# Altium PCB Aeroval-v2-PCB1.PcbDoc (part 1 of 2)
Units mm, origin at the board's own origin, x right, y up, seen from the top; angles counter-clockwise.
Board outline 100 x 100 mm, 6 copper layers (Top Layer, Internal Plane (GND), Signal Layer (VERT), Signal Layer 2 (HOR), Internal Plane (PWR), Bottom Layer), stack 1.231 mm thick; 208 components, 166 nets, 796 pads, 481 vias.
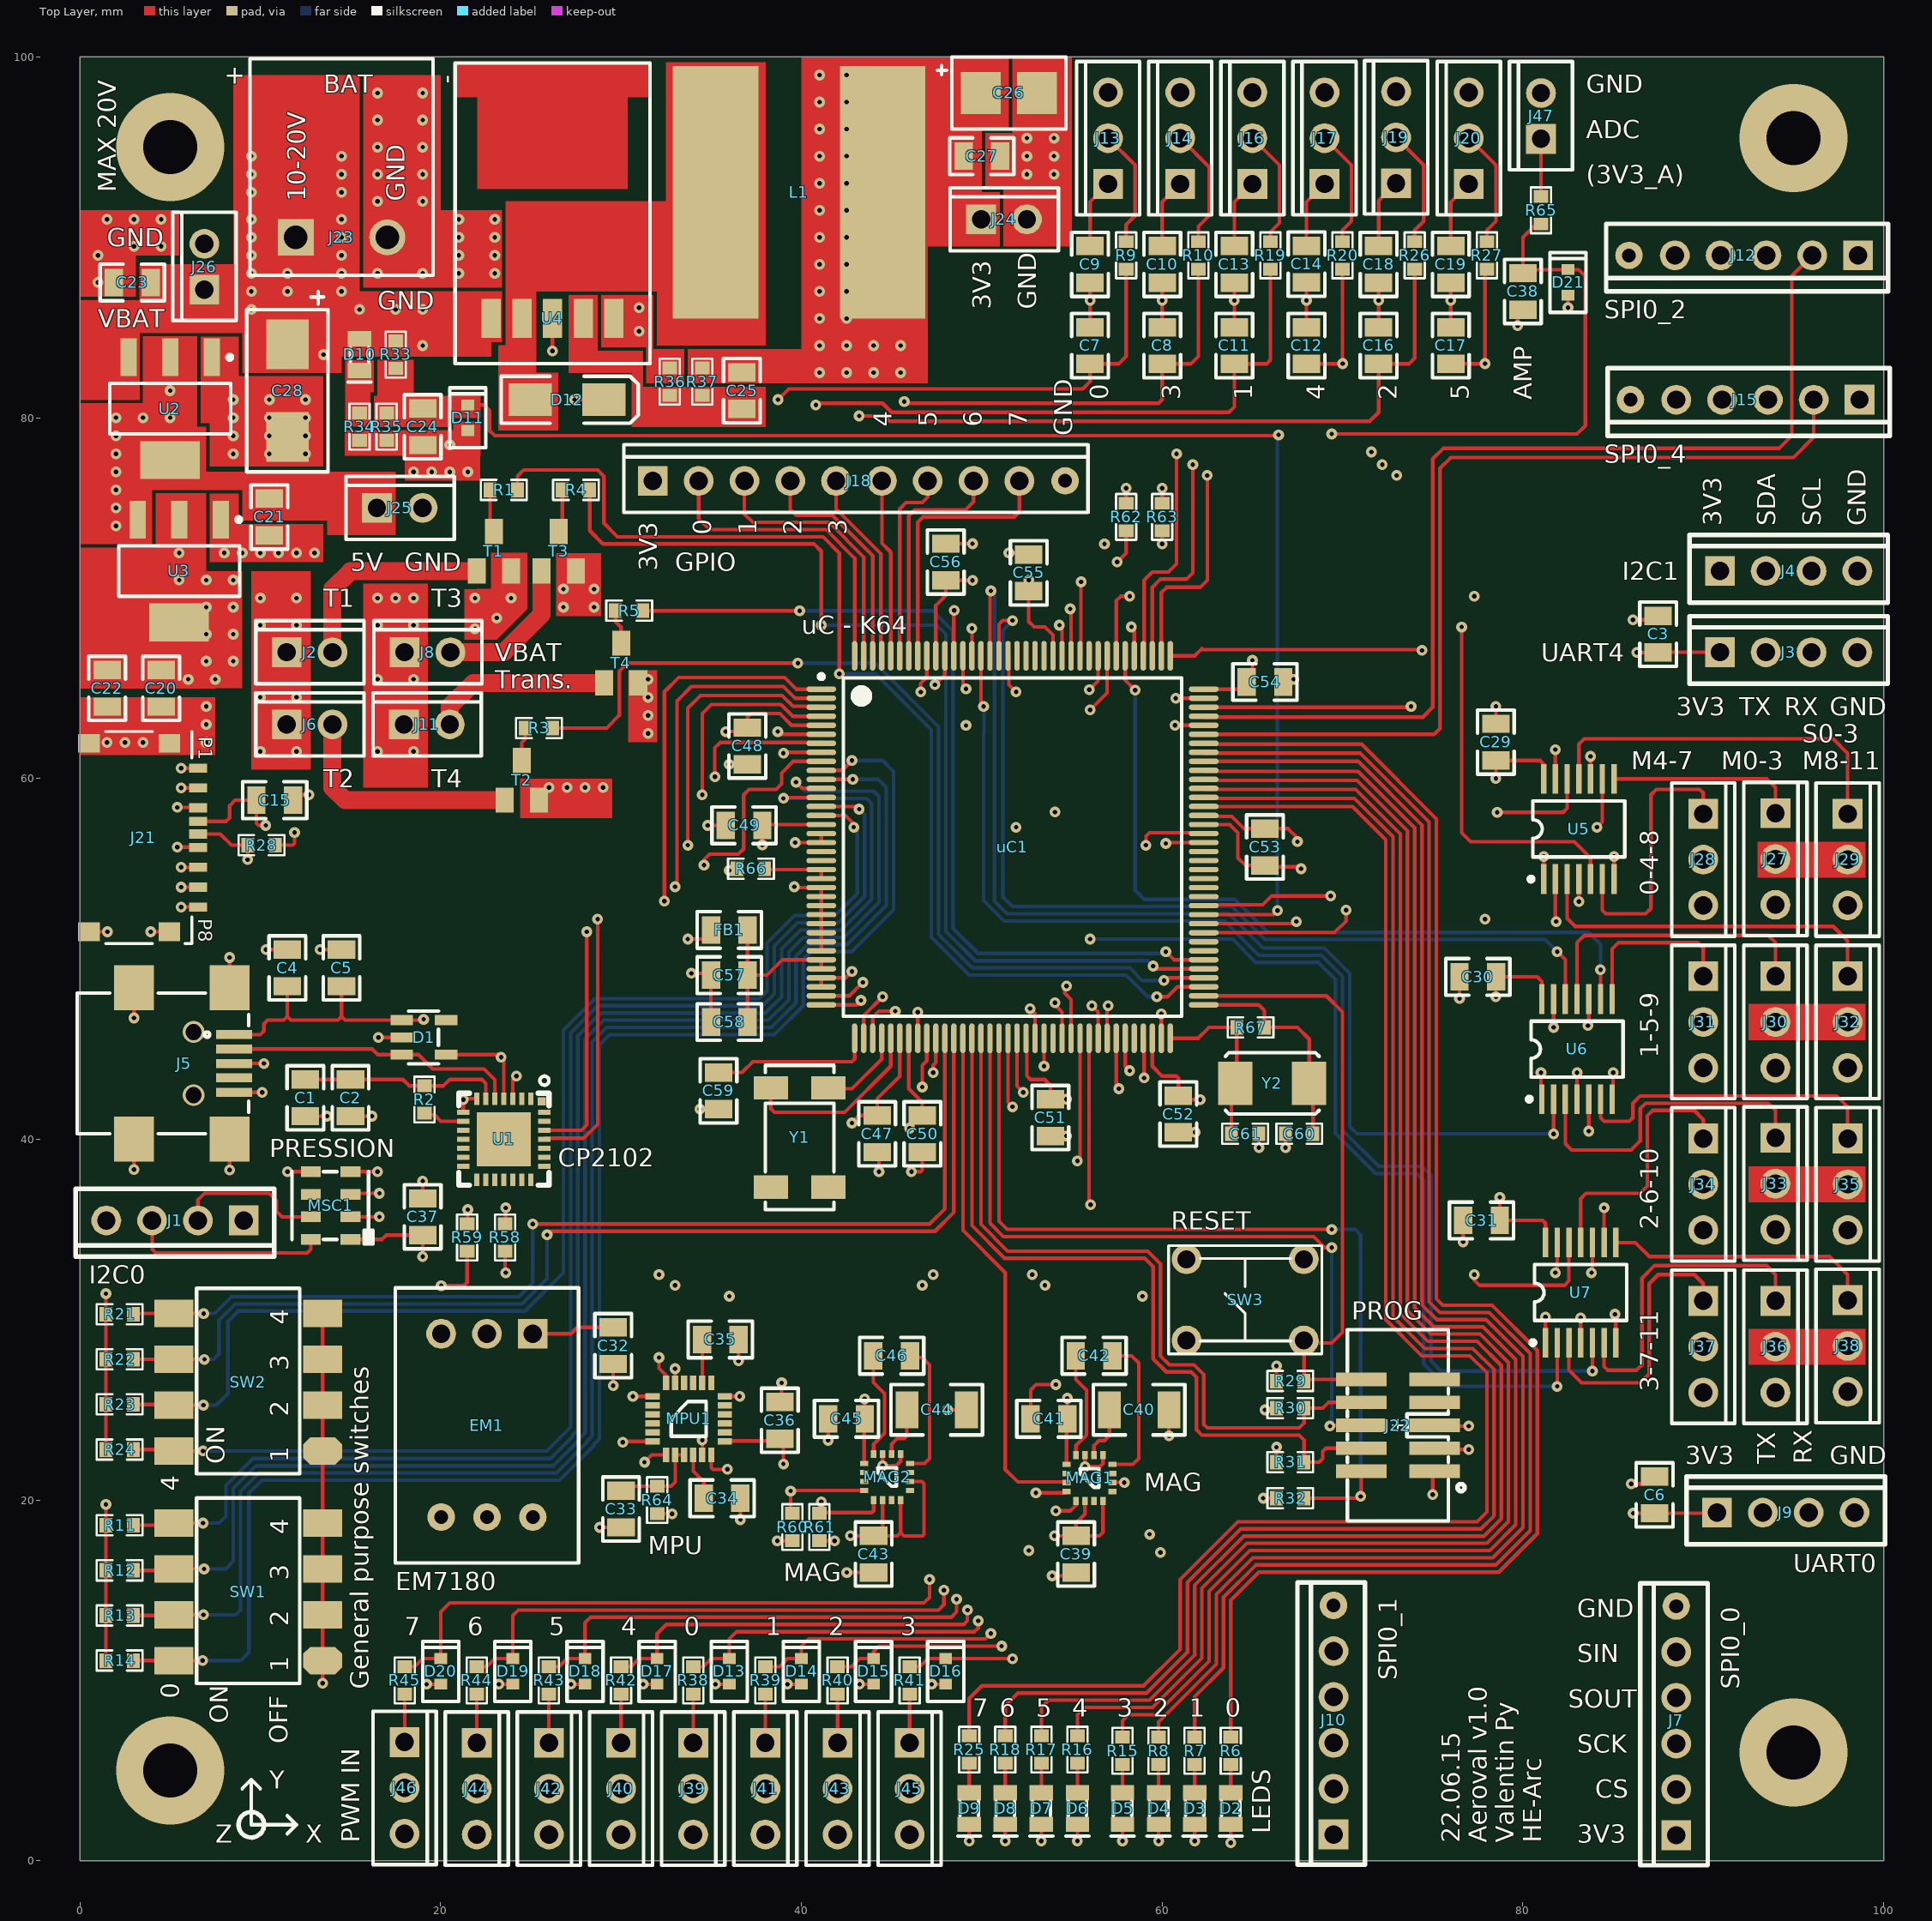
[diagram p0: Top Layer view]
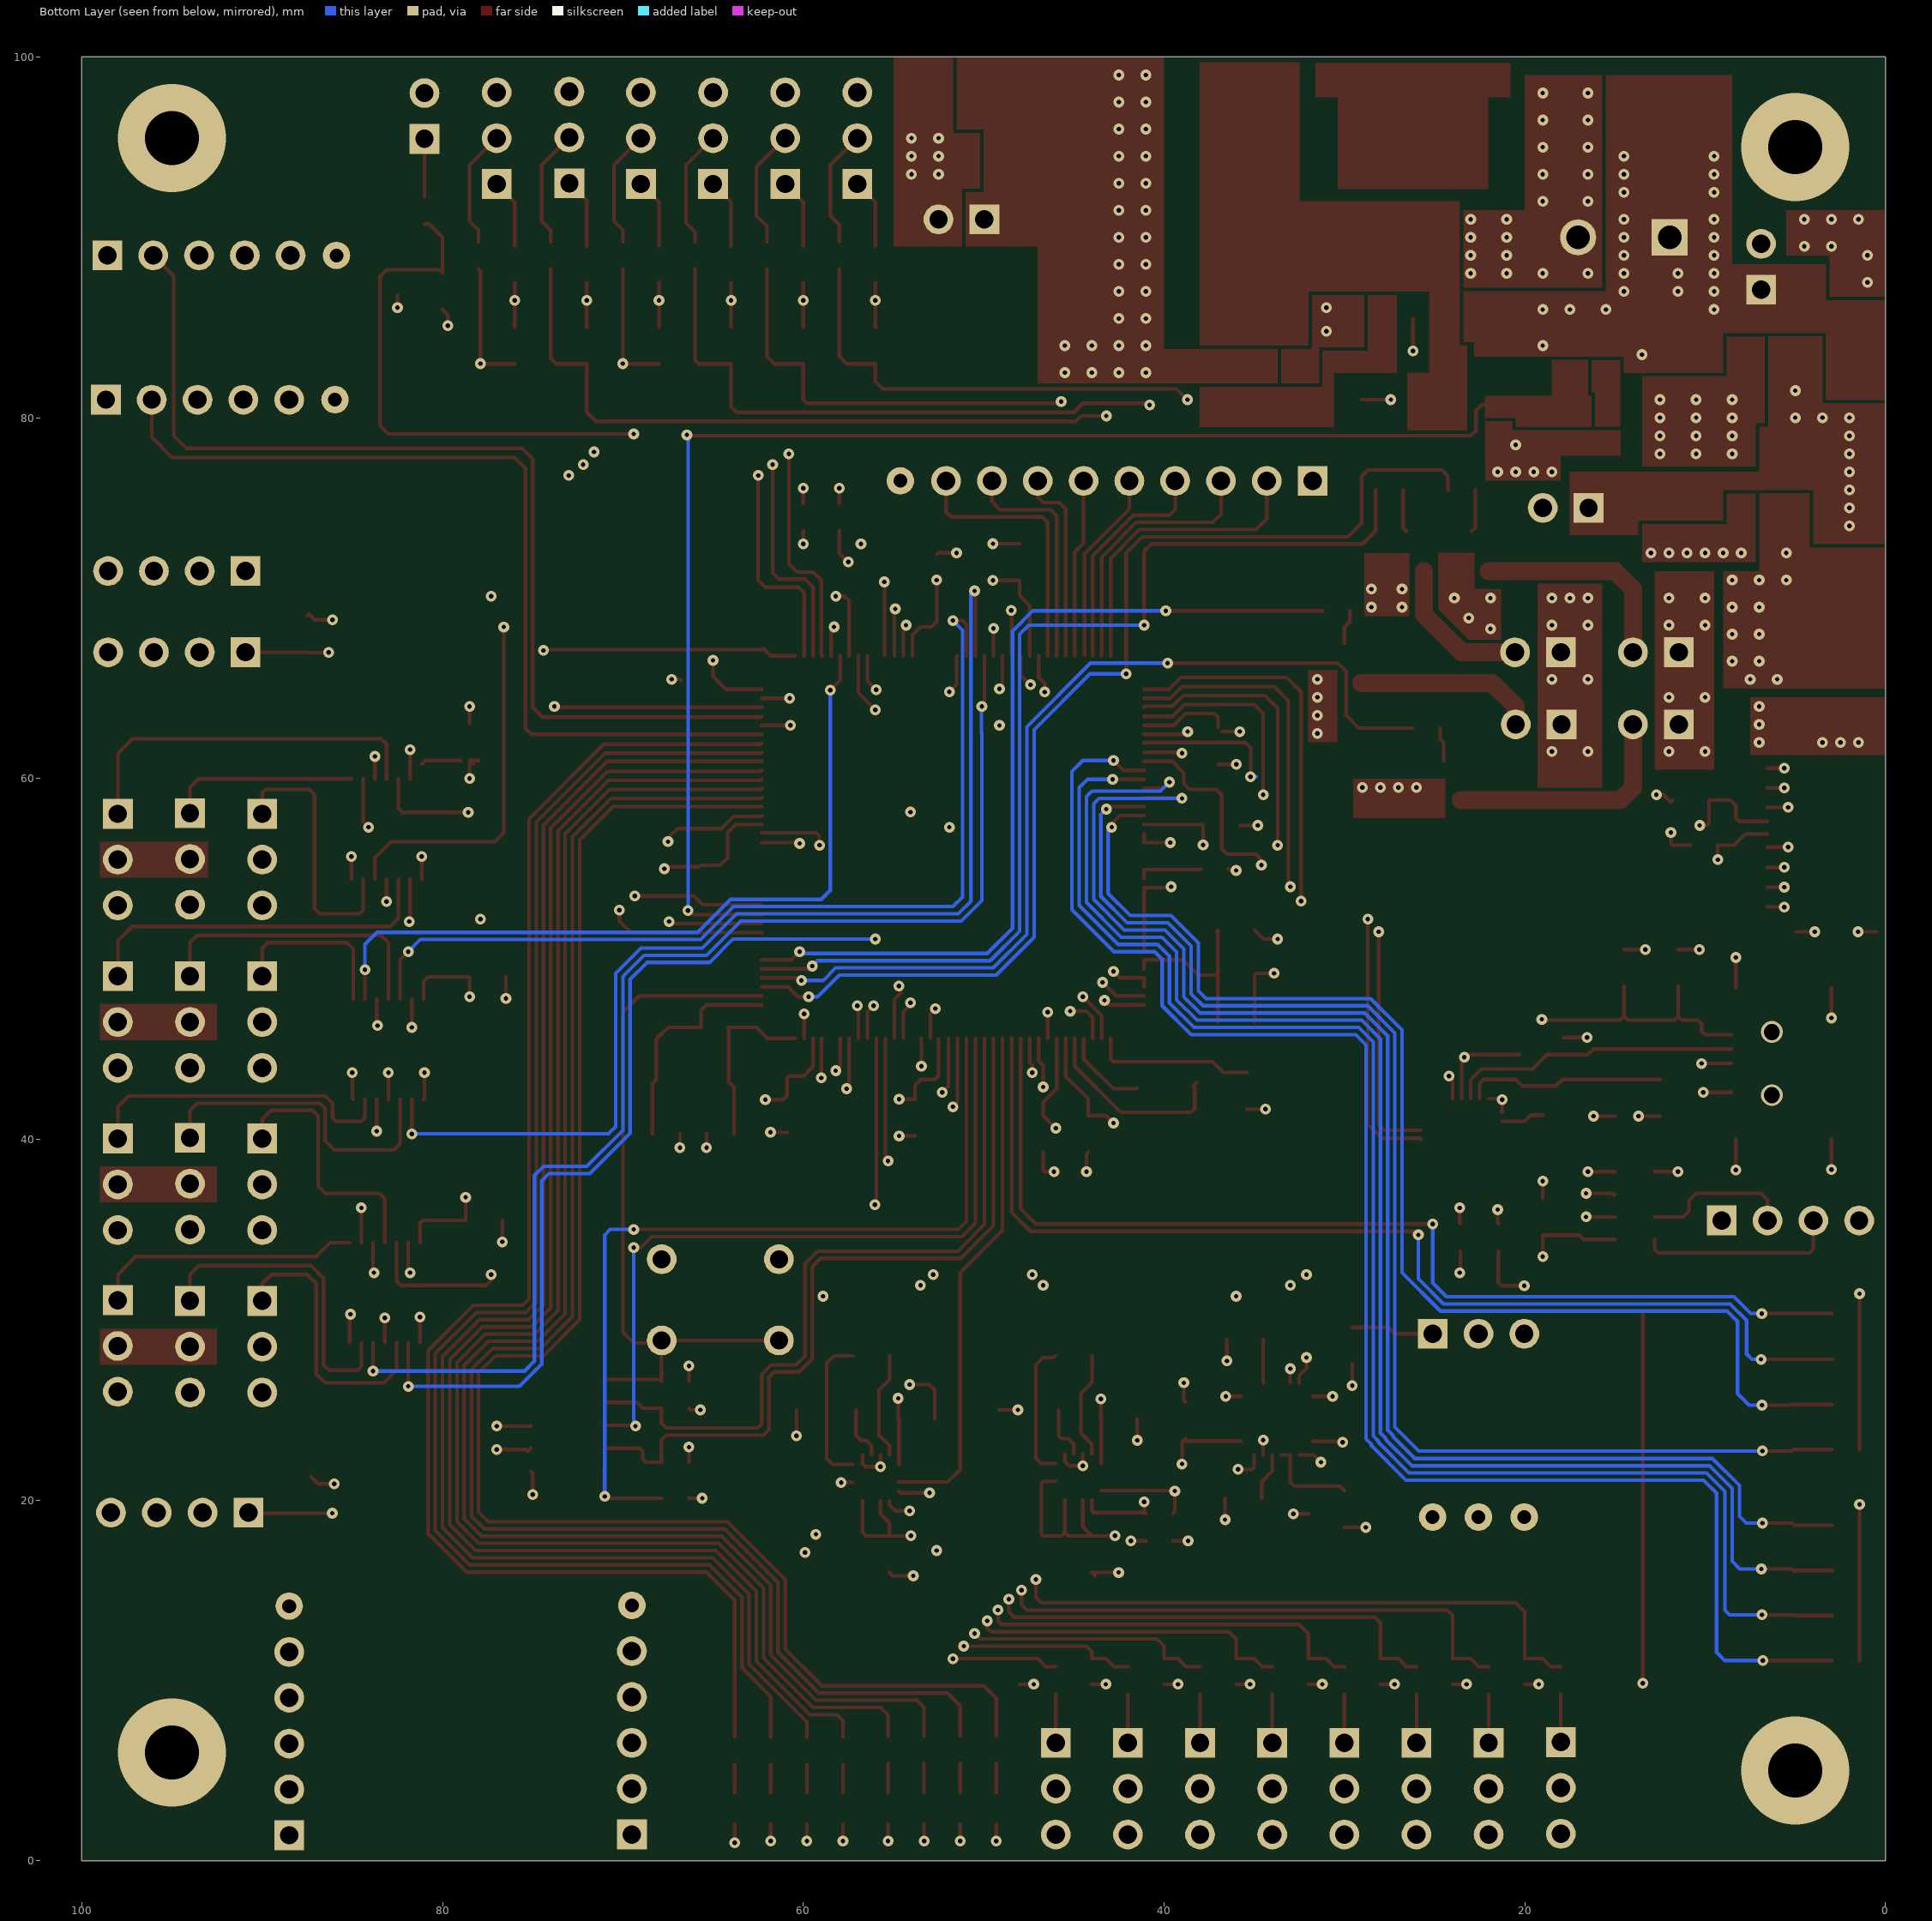
[diagram p1: Bottom Layer view, seen from below]
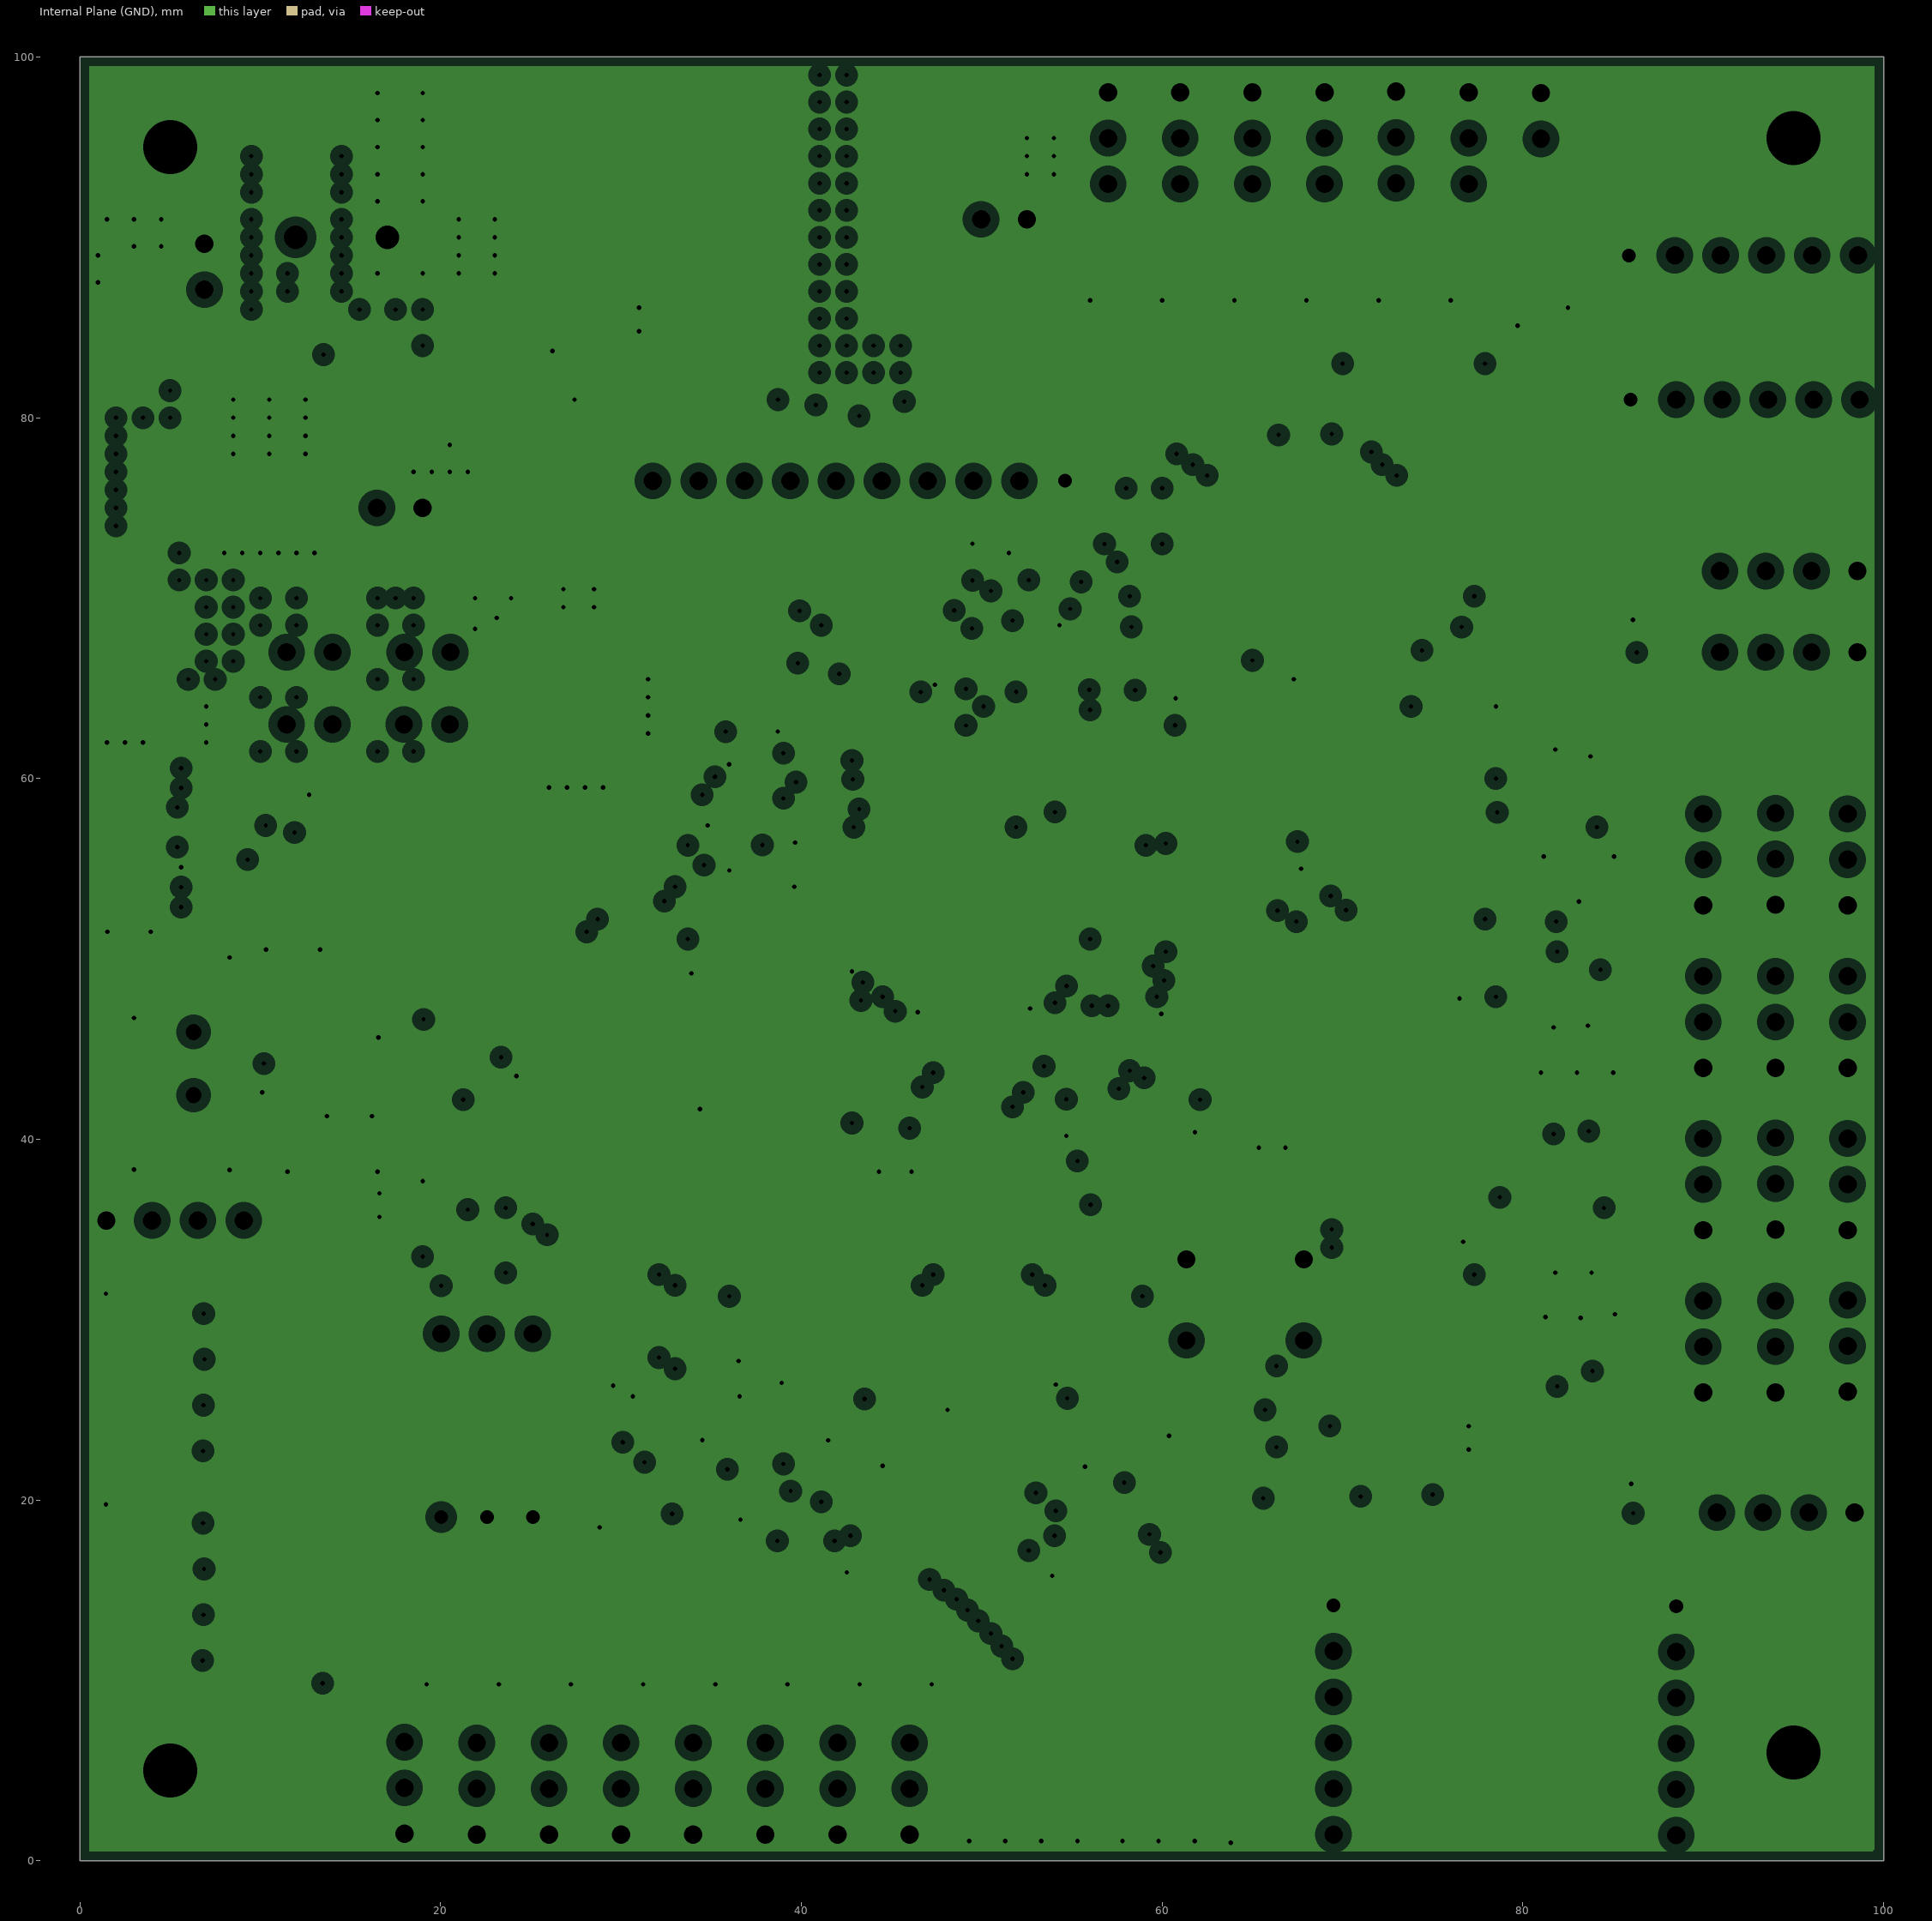
[diagram p2: Internal Plane (GND), clearances drawn from the general rule]
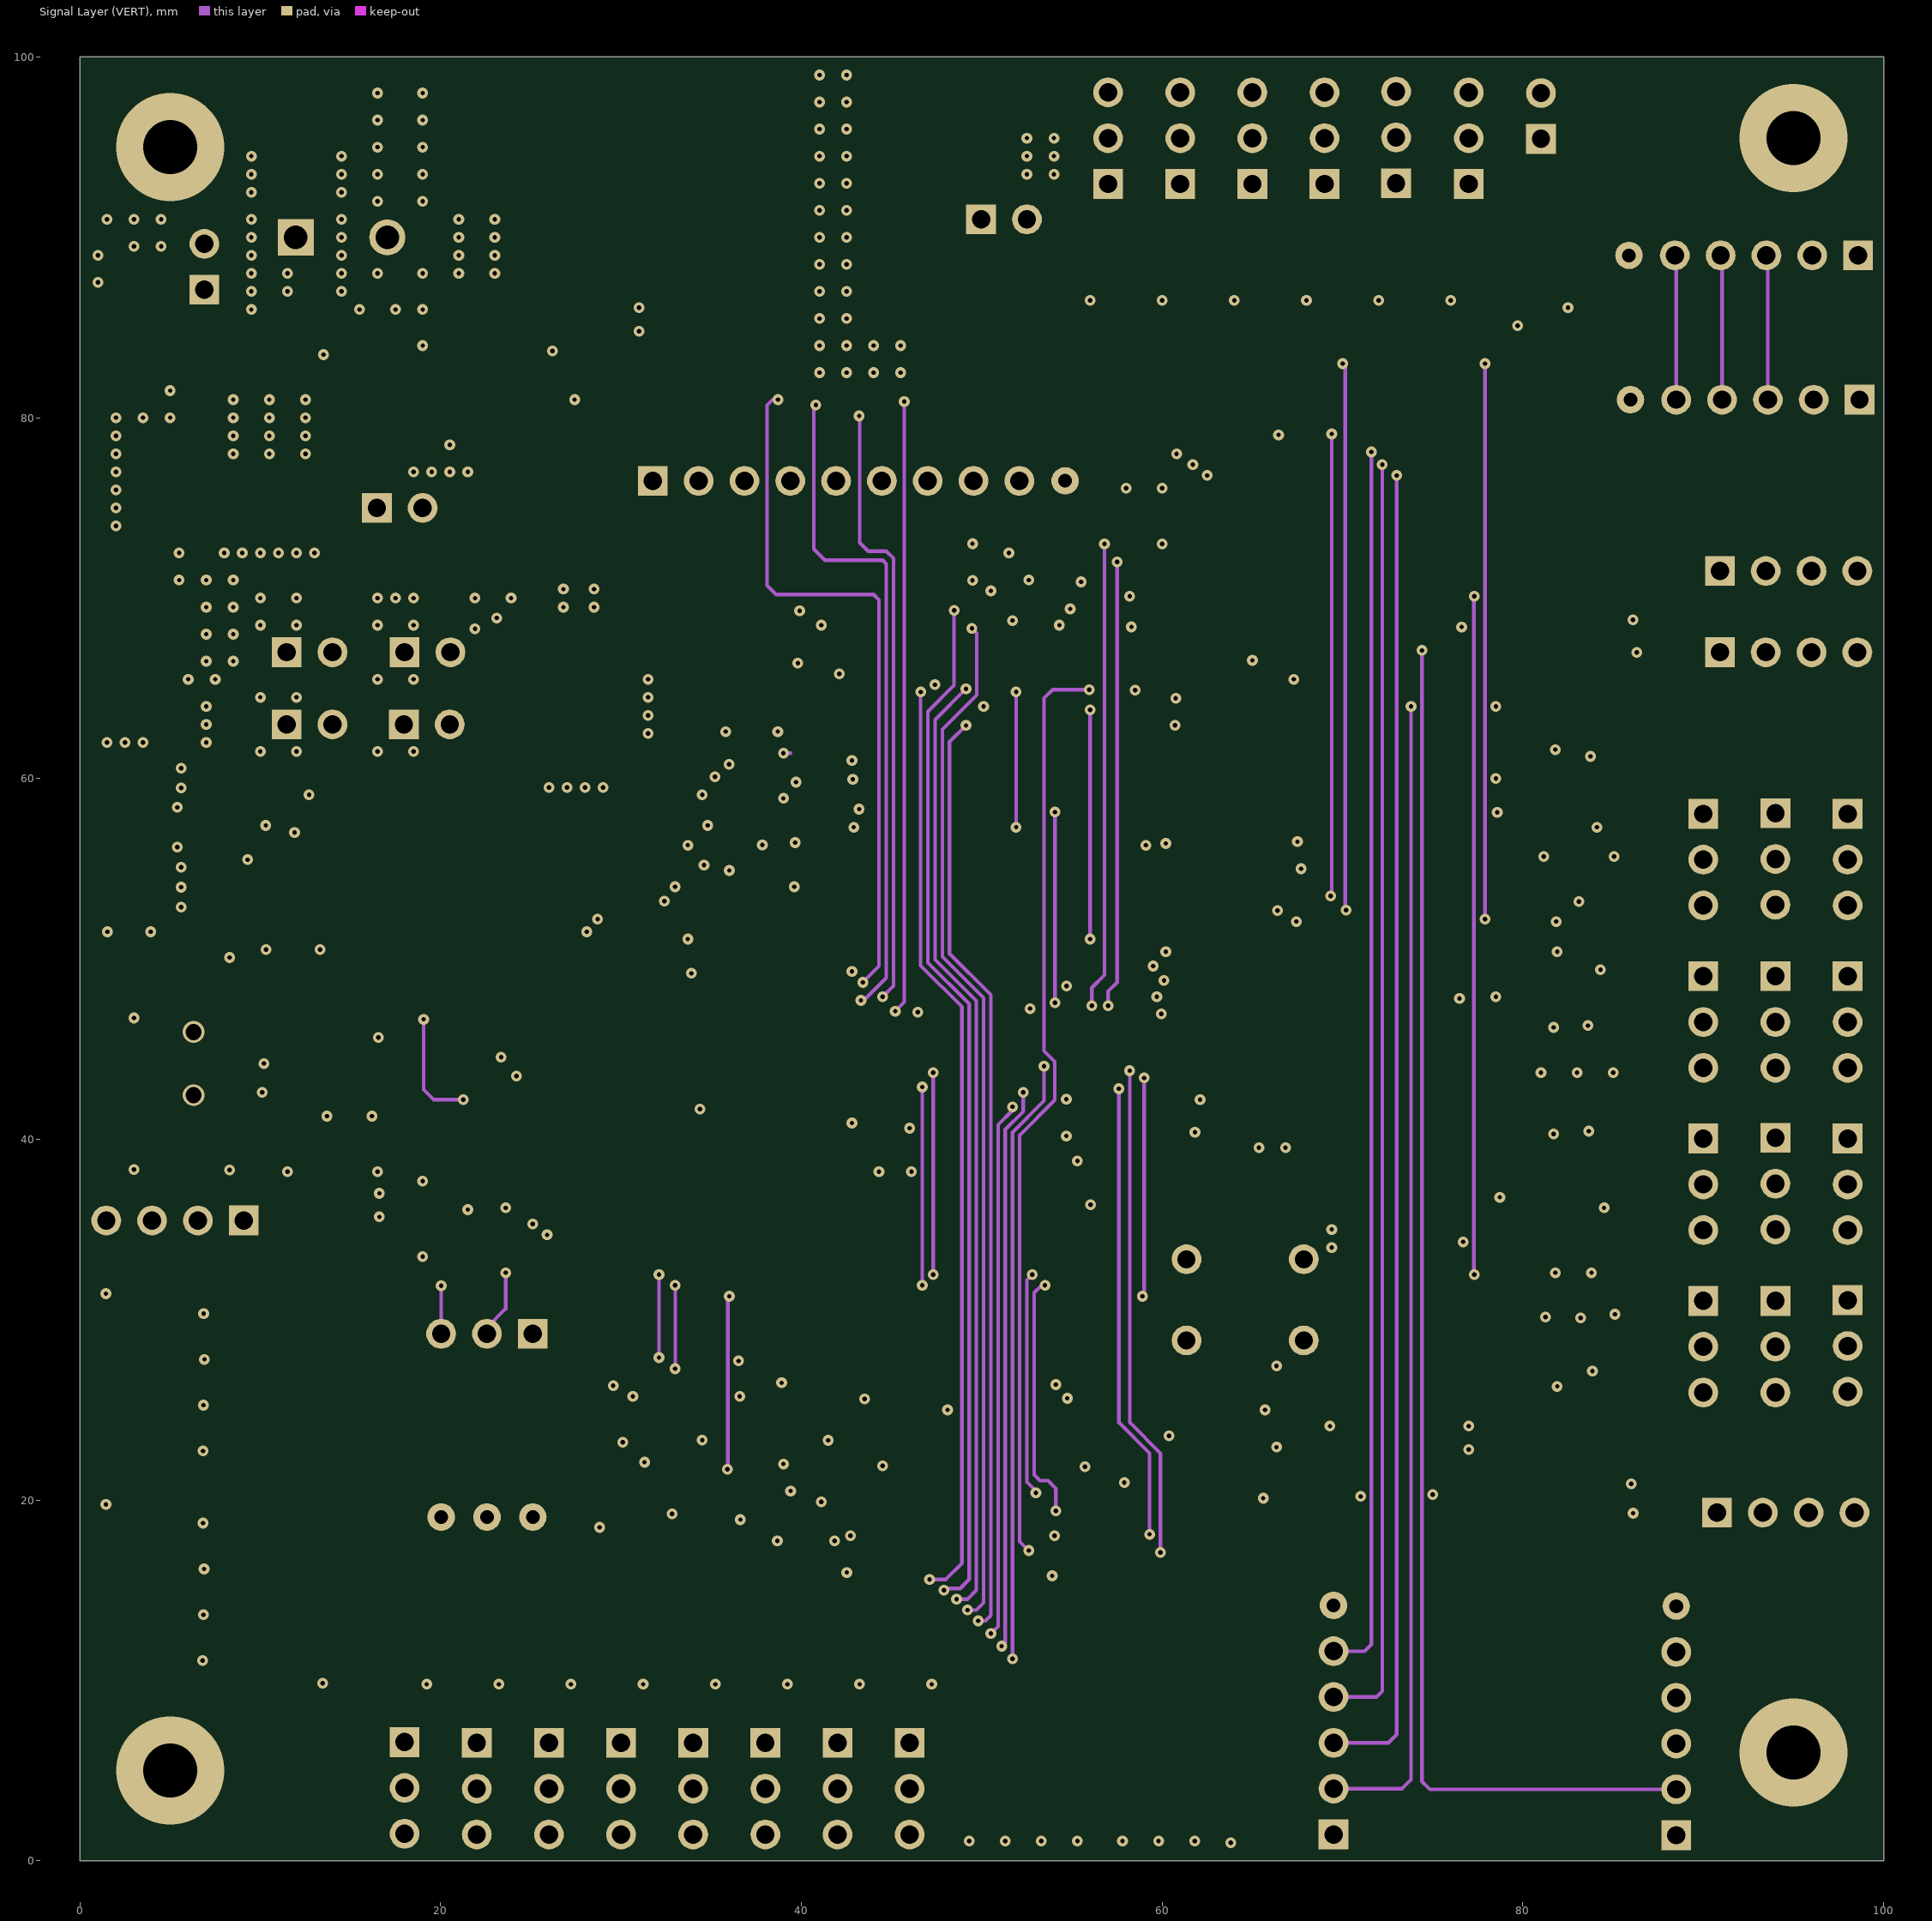
[diagram p3: Signal Layer (VERT)]
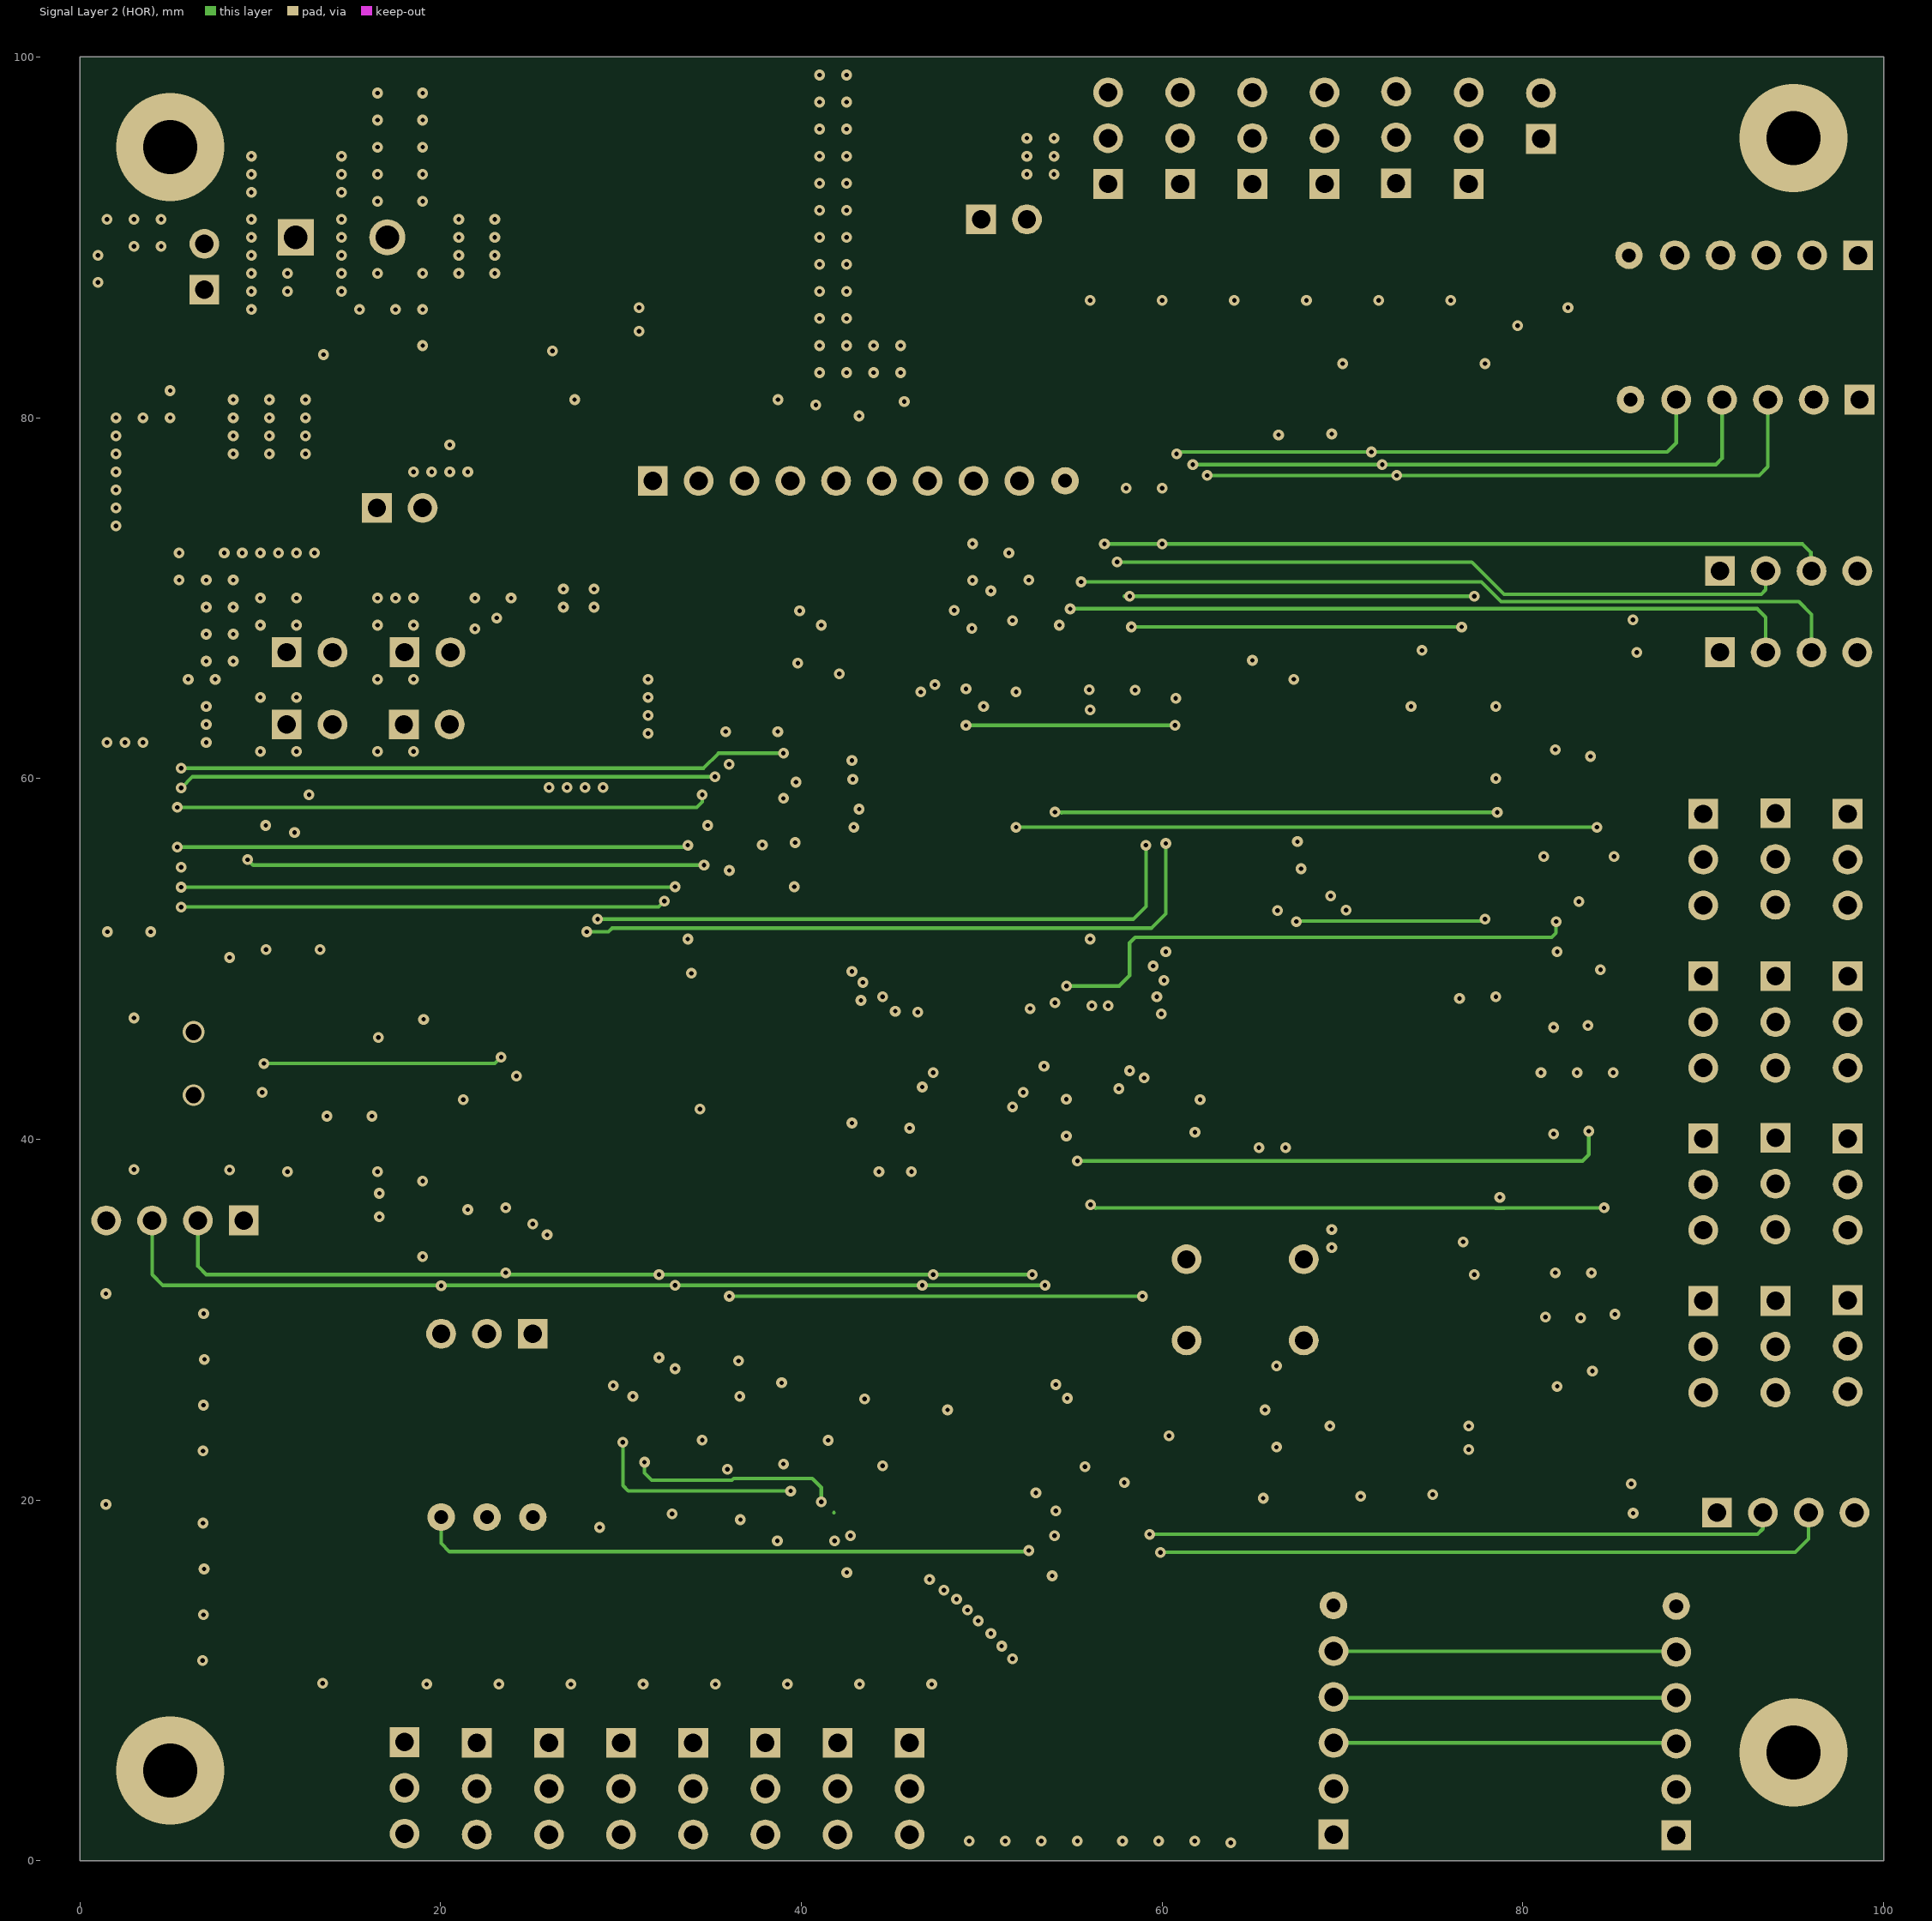
[diagram p4: Signal Layer 2 (HOR)]
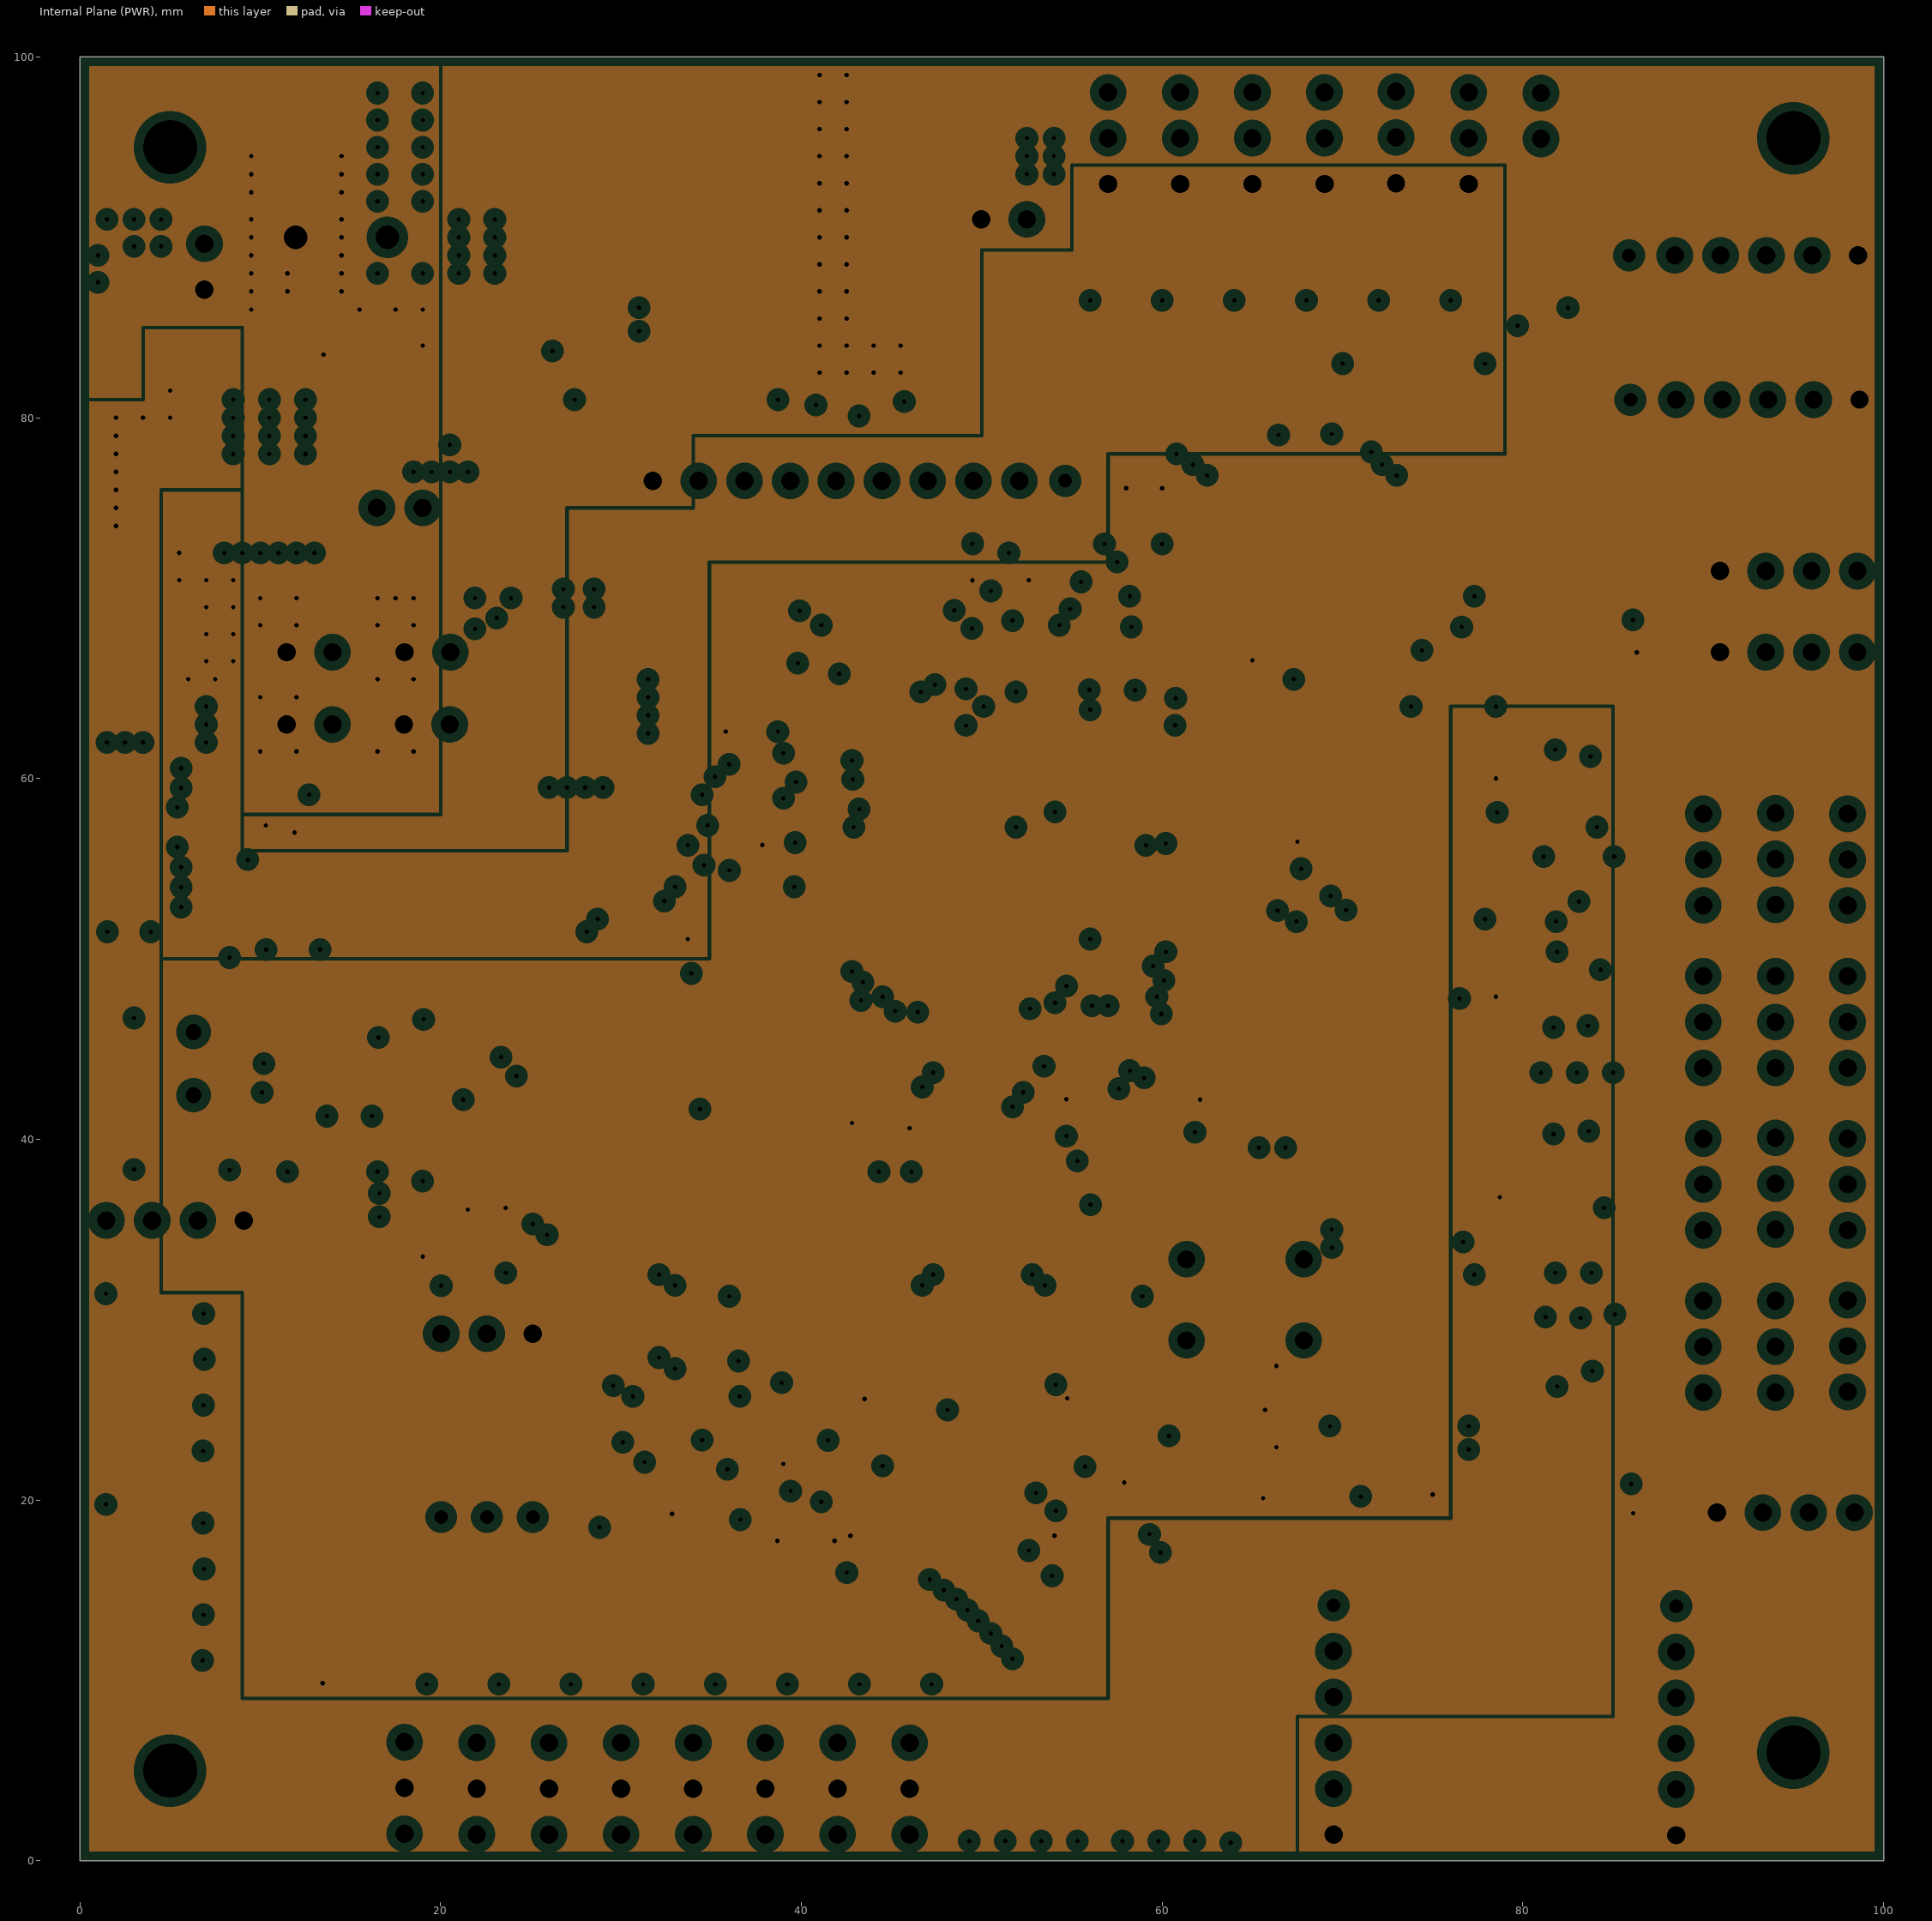
[diagram p5: Internal Plane (PWR), clearances drawn from the general rule]

## Layer stack, top to bottom
Top Solder: solder mask 0.0102, Solder Resist, Dk 3.5
Top Layer: signal copper 0.0356
Dielectric 1: core 0.254, FR-4, Dk 4.2
Internal Plane (GND): plane copper 0.036, net GND
Dielectric 3: prepreg 0.127, Dk 4.2
Signal Layer (VERT): signal copper 0.036
Dielectric 5: core 0.254, Dk 4.2
Signal Layer 2 (HOR): signal copper 0.036
Dielectric 4: prepreg 0.127, Dk 4.2
Internal Plane (PWR): plane copper 0.036, net (Multiple Nets)
Dielectric 2: core 0.254, Dk 4.2
Bottom Layer: signal copper 0.0356
Bottom Solder: solder mask 0.0102, Solder Resist, Dk 3.5

## Board outline
0,0 0,100 100,100 100,0

## Design rules (kind name [scope] priority, off if disabled: settings)
Clearance [All] p1: gap=0.15
FanoutControl Fanout_LCC [IsLCC] p2: bgadir=Out bgaviamode=Centered fanoutstyle=Auto fanoutdirection=OutOnly viagrid=0.025 // Fanout_LCC (Default Rule)
FanoutControl Fanout_SOIC [IsSOIC] p3: bgadir=Out bgaviamode=Centered fanoutstyle=Auto fanoutdirection=OutOnly viagrid=0.025 // Fanout_SOIC (Default Rule)
FanoutControl Fanout_Small [(CompPinCount < 5)] p4: bgadir=Out bgaviamode=Centered fanoutstyle=Auto fanoutdirection=OutOnly viagrid=0.025 // Fanout_Small (Default Rule)
FanoutControl Fanout_Default [All] p5: bgadir=Out bgaviamode=Centered fanoutstyle=Auto fanoutdirection=OutOnly viagrid=0.025 // Fanout_Default (Default Rule)
HoleSize [All] p1: absolutevalues=TRUE maxlimit=6 minlimit=0.25 maxpercent=80.000 minpercent=20.000
PlaneClearance [All] p1: clearance=0.508
PlaneConnect [All] p1: planeconnectstyle=Relief reliefexpansion=0.508 reliefentries=4 reliefconductorwidth=0.254 reliefairgap=0.254
PolygonConnect [All] p1: connectstyle=Relief reliefconductorwidth=0.254 reliefentries=4 polygonreliefangle="90 Angle" airgapwidth=0.254
RoutingVias [All] p1: holewidth=0.25 width=0.6 viastyle="Through Hole" minholewidth=0.25 minwidth=0.6 maxholewidth=1 maxwidth=1.5
SolderMaskExpansion [All] p1: expansion=0.102
UnpouredPolygon [All] p1: allowunpoured=FALSE
Width [All] p1: maxlimit=10 minlimit=0.2 preferedwidth=0.2 minimp=50.000000 maximp=50.000000 favimp=50.000000
22 further rules are at their usual default settings.

## Classes and differential pairs
component class uC: C47 C48 C49 C50 C51 C52 C53 C54 C55 C56 C57 C58 C59 C60 C61 FB1 R66 R67 uC1 Y1 Y2
component class Sensors: C32 C33 C34 C35 C36 C37 C38 C39 C40 C41 C42 C43 C44 C45 C46 D21 EM1 J47 MAG1 MAG2 MPU1 MSC1 R58 R59 R60 R61 R62 R63 R64 R65
component class PWM: C29 C30 C31 D13 D14 D15 D16 D17 D18 D19 D20 J27 J28 J29 J30 J31 J32 J33 J34 J35 J36 J37 J38 J39 J40 J41 J42 J43 J44 J45 J46 R38 R39 R40 R41 R42 R43 R44 R45 U5 U6 U7
component class Power_supply: C20 C21 C22 C23 C24 C25 C26 C27 C28 D10 D11 D12 J23 J24 J25 J26 L1 R33 R34 R35 R36 R37 U2 U3 U4
component class Interfaces: C1 C2 C3 C4 C5 C6 C7 C8 C9 C10 C11 C12 C13 C14 C15 C16 C17 C18 C19 D1 D2 D3 D4 D5 D6 D7 D8 D9 J1 J2 J3 J4 J5 J6 J7 J8 J9 J10 J11 J12 J13 J14 J15 J16 J17 J18 J19 J20 J21 J22 R1 R2 R3 R4 R5 R6 R7 R8 R9 R10 R11 R12 R13 R14 R15 R16 R17 R18 R19 R20 R21 R22 R23 R24 R25 R26 R27 R28 R29 R30 R31 R32 SW1 SW2 SW3 T1 T2 T3 T4 U1

## Components (designator, comment, footprint, x,y, rotation, side; value= is the part's Value field where it differs from the comment)
C1 "100nF" 080503 12.5,42.3 r270 top
C2 "1uF" 080503 15,42.3 r270 top
C3 "1uF" 080503 87.5,68 r90 top
C4 "1uF" 080503 11.5,49.5 r90 top
C5 "100nF" 080503 14.5,49.5 r270 top
C6 "1uF" 080503 87.3,20.284 r90 top
C7 "1uF" 080503 56,84 r90 top
C8 "1uF" 080503 60,84 r90 top
C9 "100nF" 080503 56,88.5 r270 top
C10 "100nF" 080503 60,88.5 r270 top
C11 "1uF" 080503 64,84 r90 top
C12 "1uF" 080503 68,84 r90 top
C13 "100nF" 080503 64,88.5 r270 top
C14 "100nF" 080503 68,88.516 r270 top
C15 "100nF" 080503 10.8,58.8 r180 top
C16 "1uF" 080503 72,84 r90 top
C17 "1uF" 080503 76,84 r90 top
C18 "100nF" 080503 72,88.5 r270 top
C19 "100nF" 080503 76,88.5 r270 top
C20 "100nF" 080503 4.5,65 r270 top
C21 "10uF" 080501 10.5,74.5 r90 top
C22 "10uF" 080501 1.5,65 r90 top
C23 "1uF" 080503 2.9,87.5 r180 top
C24 "1uF" 080503 19,79.5 r270 top
C25 "10nF" 080503 36.7,81.5 r270 top
C26 "220uF" 1411 51.5,98 r0 top
C27 "1uF" 080503 50,94.5 r0 top
C28 "22uF" 2413 11.5,81.5 r270 top
C29 "100nF" 080503 78.5,62.016 r90 top
C30 "100nF" 080503 77.5,49 r180 top
C31 "100nF" 080503 77.7,35.5 r180 top
C32 "1uF" 080503 29.565,28.557 r270 top
C33 "10nF" 080503 30,19.5 r270 top
C34 "100nF" 080503 35.6,20.1 r0 top
C35 "2.2nF" 080503 35.5,28.9 r0 top
C36 "100nF" 080503 38.8,24.416 r90 top
C37 "100nF" 080503 19,35.7 r270 top
C38 "100nF" 080503 80,87 r270 top
C39 "100nF" 080503 55.222,17 r270 top
C40 "4.7uF" 120605 58.722,25 r0 top
C41 "100nF" 080503 53.722,24.5 r180 top
C42 "220nF" 080503 56.222,28 r0 top
C43 "100nF" 080503 44,17 r270 top
C44 "4.7uF" 120605 47.5,25 r0 top
C45 "100nF" 080503 42.5,24.5 r180 top
C46 "220nF" 080503 45,28 r0 top
C47 "100nF" 080503 44.2,40.3 r270 top
C48 "100nF" 080503 37,61.8 r90 top
C49 "100nF" 080503 36.816,57.4 r0 top
C50 "100nF" 080503 46.7,40.3 r90 top
C51 "100nF" 080503 53.8,41.2 r90 top
C52 "100nF" 080503 60.9,41.4 r90 top
C53 "100nF" 080503 65.7,56.2 r90 top
C54 "100nF" 080503 65.7,65.35 r180 top
C55 "100nF" 080503 52.6,71.4 r270 top
C56 "100nF" 080503 48,72 r270 top
C57 "10uF" 080503 36,49.1 r0 top
C58 "100nF" 080503 36,46.5 r180 top
C59 "100nF" 080503 35.4,42.684 r270 top
C60 "18pF" 060301 67.6,40.3 r270 top
C61 "18pF" 060301 64.6,40.3 r90 top
D1 "SP0504BAHTG" SOT23501 17.836,46.6 r0 top
D2 "LED" "LED_0805 - GREEN" 63.8,2.9 r270 top
D3 "LED" "LED_0805 - GREEN" 61.8,2.9 r270 top
D4 "LED" "LED_0805 - GREEN" 59.8,2.9 r270 top
D5 "LED" "LED_0805 - GREEN" 57.8,2.9 r270 top
D6 "LED" "LED_0805 - GREEN" 55.3,2.9 r270 top
D7 "LED" "LED_0805 - GREEN" 53.3,2.9 r270 top
D8 "LED" "LED_0805 - GREEN" 51.3,2.9 r270 top
D9 "LED" "LED_0805 - GREEN" 49.3,2.9 r270 top
D10 "LED" "LED_0805 - GREEN" 15.5,83.5 r270 top
D11 "TVS DIODE 3.3V" SOD-523 21.5,80 r90 top
D12 "B230A-13-F" SMA 27,81 r0 top
D13 "TVS DIODE 3.3V" SOD-523 36,10.5 r90 top
D14 "TVS DIODE 3.3V" SOD-523 40,10.5 r90 top
D15 "TVS DIODE 3.3V" SOD-523 44,10.5 r90 top
D16 "TVS DIODE 3.3V" SOD-523 48,10.5 r90 top
D17 "TVS DIODE 3.3V" SOD-523 32,10.5 r90 top
D18 "TVS DIODE 3.3V" SOD-523 28,10.5 r90 top
D19 "TVS DIODE 3.3V" SOD-523 24,10.5 r90 top
D20 "TVS DIODE 3.3V" SOD-523 20,10.5 r90 top
D21 "TVS DIODE 3.3V" SOD-523 82.5,87.5 r90 top
EM1 "EM7180SFP" EM7180SFP 22.565,29.217 r180 top locked
FB1 "BLM21BB331SN1D" 080501 36,51.6 r180 top
J1 "CONN_4" 640454-4 5.27,35.5 r180 top
J2 "CONN_2" 640454-2 14,67 r0 top
J3 "CONN_4" 640454-4 94.73,67 r0 top
J4 "CONN_4" 640454-4 94.73,71.5 r0 top
J5 "UX60-MB-5ST" USB/UX60-MB-5ST 8.55,44.2 r270 top
J6 "CONN_2" 640454-2 14,63 r0 top
J7 "CONN_6" 640454-6 88.5,6.5 r90 top
J8 "CONN_2" 640454-2 20.54,67 r0 top
J9 "CONN_4" 640454-4 94.57,19.3 r0 top
J10 "CONN_6" 640454-6 69.5,6.54 r90 top
J11 "CONN_2" 640454-2 20.5,63 r0 top
J12 "CONN_6" 640454-6 93.5,89 r180 top
J13 "CONN_3" 640454-3 57,95.5 r90 top
J14 "CONN_3" 640454-3 61,95.5 r90 top
J15 "CONN_6" 640454-6 93.58,81 r180 top
J16 "CONN_3" 640454-3 65,95.5 r90 top
J17 "CONN_3" 640454-3 69,95.5 r90 top
J18 "CONN_10" 640454-10 40.65,76.5 r0 top
J19 "CONN_3" 640454-3 72.968,95.54 r90 top
J20 "CONN_3" 640454-3 77,95.5 r90 top
J21 "CONN_SD" con8_sdcard_push_sm 7.613,56.952 r90 top
J22 "FTSH-105-01-F-DV-K" FTSH-105-01-F-DV-K 73.068,24.14 r90 top
J23 "CONN_BAT" SL508_2C 14.5,90 r0 top
J24 "CONN_2" 640454-2 52.5,91 r0 top
J25 "CONN_2" 640454-2 19,75 r0 top
J26 "CONN_2" 640454-2 6.9,89.64 r90 top
J27 "CONN_3" 640454-3 94,55.54 r270 top
J28 "CONN_3" 640454-3 90,55.5 r270 top
J29 "CONN_3" 640454-3 98,55.5 r270 top
J30 "CONN_3" 640454-3 94,46.5 r270 top
J31 "CONN_3" 640454-3 90,46.5 r270 top
J32 "CONN_3" 640454-3 98,46.5 r270 top
J33 "CONN_3" 640454-3 94,37.54 r270 top
J34 "CONN_3" 640454-3 90,37.5 r270 top
J35 "CONN_3" 640454-3 98,37.5 r270 top
J36 "CONN_3" 640454-3 94,28.5 r270 top
J37 "CONN_3" 640454-3 90,28.5 r270 top
J38 "CONN_3" 640454-3 98,28.54 r270 top
J39 "CONN_3" 640454-3 34,4 r270 top
J40 "CONN_3" 640454-3 30,4 r270 top
J41 "CONN_3" 640454-3 38,4 r270 top
J42 "CONN_3" 640454-3 26,4 r270 top
J43 "CONN_3" 640454-3 42,4 r270 top
J44 "CONN_3" 640454-3 22,4 r270 top
J45 "CONN_3" 640454-3 46,4 r270 top
J46 "CONN_3" 640454-3 18,4.04 r270 top
J47 "CONN_2" 640454-2 81,98 r90 top
L1 "82uH" L1 35.25,92.5 r90 top
MAG1 "HMC5983" QFN16 55.222,19.95 r90 top
MAG2 "HMC5983" QFN16 44,20 r90 top
MPU1 "MPU-6000" QFN24 31.85,25.75 r0 top
MSC1 "MS5611" MS5611 15,34.45 r180 top
R1 "1.69k" 060301 23.5,76 r90 top
R2 "4k7" 060301 19.1,42.2 r0 top
R3 "1.69k" 060301 25.45,62.8 r90 top
R4 "1.69k" 060301 27.5,76 r90 top
R5 "1.69k" 060301 30.45,69.3 r90 top
R6 "220R" 060301 63.8,6.1 r180 top
R7 "220R" 060301 61.8,6.1 r180 top
R8 "220R" 060301 59.8,6.1 r180 top
R9 "15k" 060301 58,89 r180 top
R10 "15k" 060301 62,89 r180 top
R11 "4k7" 060301 2.2,18.6 r270 top
R12 "4k7" 060301 2.2,16.1 r270 top
R13 "4k7" 060301 2.2,13.6 r270 top
R14 "4k7" 060301 2.2,11.1 r270 top
R15 "220R" 060301 57.8,6.1 r180 top
R16 "220R" 060301 55.3,6.162 r180 top
R17 "220R" 060301 53.3,6.162 r180 top
R18 "220R" 060301 51.3,6.162 r180 top
R19 "15k" 060301 66,89 r180 top
R20 "15k" 060301 70,89 r180 top
R21 "4k7" 060301 2.2,30.3 r270 top
R22 "4k7" 060301 2.2,27.8 r270 top
R23 "4k7" 060301 2.2,25.3 r270 top
R24 "4k7" 060301 2.2,22.8 r270 top
R25 "220R" 060301 49.3,6.162 r180 top
R26 "15k" 060301 74,89 r180 top
R27 "15k" 060301 78,89 r180 top
R28 "10k" 060301 10.062,56.3 r90 top
R29 "2k2" 060301 67.1,26.6 r90 top
R30 "10k" 060301 67.1,25.1 r270 top
R31 "10k" 060301 67.1,22.1 r270 top
R32 "2k2" 060301 67.1,20.1 r90 top
R33 "4k7" 060301 17.5,83.5 r0 top
R34 "2k" 060301 15.5,79.5 r0 top
R35 "1k" 060301 17,79.5 r180 top
R36 "1k" 060301 32.7,82 r180 top
R37 "1.69k" 060301 34.5,82 r0 top
R38 "330R" 060301 34,10 r180 top
R39 "330R" 060301 38,10 r180 top
R40 "330R" 060301 42,10 r180 top
R41 "330R" 060301 46,10 r180 top
R42 "330R" 060301 30,10 r180 top
R43 "330R" 060301 26,10 r180 top
R44 "330R" 060301 22,10 r180 top
R45 "330R" 060301 18,10 r180 top
R58 "4k7" 060301 23.565,34.557 r0 top
R59 "4k7" 060301 21.465,34.557 r0 top
R60 "4k7" 060301 39.5,18.5 r180 top
R61 "4k7" 060301 41,18.5 r180 top
R62 "4k7" 060301 58,74.5 r0 top
R63 "4k7" 060301 60,74.5 r0 top
R64 "4k7" 060301 32,20 r180 top
R65 "15k" 060301 81,91.5 r180 top
R66 "10k" 060301 37.2,55 r270 top
R67 "1M" 060301 64.9,46.2 r90 top
SW1 "SWITCH" GDS04 13.455,11.1 r90 top
SW2 "SWITCH" GDS04 13.455,22.72 r90 top
SW3 "EVQ-PAG05R" EVQ-PAG05R 64.6,31.1 r90 top
T1 "BCV27" BCV27 22.95,73.7 r0 top
T2 "BCV27" BCV27 24.5,61 r0 top
T3 "BCV27" BCV27 26.55,73.7 r0 top
T4 "BCV27" BCV27 30,67.5 r0 top
U1 "CP2102" QFN-28 22,42.25 r270 top
U2 "NCV1117ST50T3G" SOT223 5,80.5 r270 top
U3 "REG1117-3.3/2K5" SOT223 5.5,71.5 r270 top
U4 "LM2596" TO263 26.2,85.5 r270 top
U5 "SN74LV4T125" TSSOP14 83.1,57.2 r0 top
U6 "SN74LV4T125" TSSOP14 83,45 r0 top
U7 "SN74LV4T125" TSSOP14 83.2,31.5 r0 top
uC1 "MK64FN1M0VLQ12" "LQFP 144" 51.7,56.2 r0 top
Y1 "CRYSTAL 32.768k" XT-5 39.9,40.1 r270 top
Y2 "ABM3-8.000MHZ-D2Y-T" XT8_2-SMD 66.1,43.1 r180 top

## Footprints (in the part's own frame and the unit in brackets; to place one, negate y for a bottom-side part, rotate by r counter-clockwise, add the part's x,y. Pads: shape width x height; smd on the part's side, far side on the other; paste and mask are expansions set on the pad)
1411 [mm]
  rect 2.21x2.35 smd: 1(-1.565,0) 2(1.565,0)
  silkscreen extent -3.96,-2 3.16,2
2413 [mm]
  rect 2.77x2.35 smd: 1(-2.57,0) 2(2.57,0)
  silkscreen extent -5.5,-2.25 4.5,2.25
060301 [mil]
  rect 32.01x27.99 smd: 1(0,-30) 2(0,30)
  silkscreen extent -22,-50 22,50
080501 [mil]
  rect 40x60 smd: 1(-40,0) 2(40,0)
  silkscreen extent -70,-40 70,40
080503 [mil]
  rect 40x60 smd: 1(-40,0) 2(40,0)
  silkscreen extent -70,-40 70,40
120605 [mil]
  rect 50x80 smd: 1(-65,0) 2(65,0)
  silkscreen extent -100,-55 100,55
640454-2 [mil] "CONN HEADER VERT 2POS .100 TIN"
  rect 65x65 hole 40: 1(-100,0)
  round 65 hole 40: 2(0,0)
  silkscreen extent -167,-69 69,69
640454-3 [mil] "CONN HEADER VERT 3POS .100 TIN"
  rect 65x65 hole 40: 1(-100,0)
  round 65 hole 40: 2(0,0) 3(100,0)
  silkscreen extent -167,-69 167,69
640454-4 [mil] "CONN HEADER VERT 4POS .100 TIN"
  rect 65x65 hole 40: 1(-150,0)
  round 65 hole 40: 2(-50,0) 3(50,0) 4(150,0)
  silkscreen extent -217,-69 217,79
640454-6 [mil] "CONN HEADER VERT 6POS .100 TIN"
  rect 65x65 hole 40: 1(-200,0)
  round 65 hole 40: 2(-100,0) 3(0,0) 4(100,0) 5(200,0)
  round 60 hole 30: 6(300,0)
  silkscreen extent -266,-69 350,79
640454-10 [mil] "CONN HEADER VERT 10POS .100 TIN"
  rect 65x65 hole 40: 1(-350,0)
  round 65 hole 40: 2(-250,0) 3(-150,0) 4(-50,0) 5(50,0) 6(150,0) 7(250,0) 8(350,0) 9(450,0)
  round 60 hole 30: 10(550,0)
  silkscreen extent -413,-69 600,79
BCV27 [mm]
  rect 1x1.4 smd: 1(0,0) 2(0.95,-2.2) 3(-0.95,-2.2)
con8_sdcard_push_sm [mil] "CON8_SDCARD_PUSH_SM"
  rect 20x40 smd: G1(-1.07,41.83) P1(142.63,41.83) P2(99.33,41.83) P3(56.02,41.83) P4(26.49,41.83) P5(-30.59,41.83) P6(-73.9,41.83) P7(-117.21,41.83) P8(-160.51,41.83)
  rect 41x47 smd: S1(196.77,104.82) S2(196.77,280.02) S3(-214.65,280.02) S4(-214.65,104.82)
  silkscreen extent -240,55 222,244
EM7180SFP [mil] "EM7180SFP 6 pos 2.54mm"
  rect 65x65 hole 40: 1(-100,0)
  round 65 hole 40: 2(0,0) 3(100,0)
  round 60 hole 30: 4(100,400) 5(0,400) 6(-100,400)
  silkscreen extent -200,-100 200,500
EVQ-PAG05R [mm] "SWITCH LT 6MM 260GF 5MM HEIGHT"
  round 1.651 hole 1: A(-2.25,3.25) A(-2.25,-3.25) B(2.25,3.25) B(2.25,-3.25)
  silkscreen extent -3,-4.25 3,4.25
FTSH-105-01-F-DV-K [mm] "1.27mm pitch, 10 pin, terminal strip; vertical, double row, w/ejector shroud, SMT"
  rect 0.75x2.8 smd mask+0: 1(-2.54,-2.032) 2(-2.54,2.032) 3(-1.27,-2.032) 4(-1.27,2.032) 5(0,-2.032) 6(0,2.032) 7(1.27,-2.032) 8(1.27,2.032) 9(2.54,-2.032) 10(2.54,2.032)
  silkscreen extent -5.3,-3.7 5.3,2.8
GDS04 [mil]
  oct 60x85 smd: 1(0,0)
  rect 60x85 smd: 2(100,0) 3(200,0) 4(300,0) 5(300,325) 6(200,325) 7(100,325) 8(0,325)
  silkscreen extent -50,50 355,275
L1 [mm]
  rect 14x4.75 smd: 1(0,0) 2(0,-9.25)
"LED_0805 - GREEN" [mm] "LED_0805"
  rect 0.85x1.3 smd: A(-0.875,0) C(0.875,0)
  silkscreen extent -0.38,-0.63 1.52,0.64, body extent -1,-0.62 1,0.62, height 0.26
"LQFP 144" [mm] "QFP, 144-Leads, Body 20x20mm, Pitch 0.5mm, IPC Medium Density"
  oval 1.65x0.3 smd: 1(-10.6,8.75) 2(-10.6,8.25) 3(-10.6,7.75) 4(-10.6,7.25) 5(-10.6,6.75) 6(-10.6,6.25) 7(-10.6,5.75) 8(-10.6,5.25) 9(-10.6,4.75) 10(-10.6,4.25) 11(-10.6,3.75) 12(-10.6,3.25) 13(-10.6,2.75) 14(-10.6,2.25) 15(-10.6,1.75) 16(-10.6,1.25) 17(-10.6,0.75) 18(-10.6,0.25) 19(-10.6,-0.25) 20(-10.6,-0.75) 21(-10.6,-1.25) 22(-10.6,-1.75) 23(-10.6,-2.25) 24(-10.6,-2.75) 25(-10.6,-3.25) 26(-10.6,-3.75) 27(-10.6,-4.25) 28(-10.6,-4.75) 29(-10.6,-5.25) 30(-10.6,-5.75) 31(-10.6,-6.25) 32(-10.6,-6.75) 33(-10.6,-7.25) 34(-10.6,-7.75) 35(-10.6,-8.25) 36(-10.6,-8.75) 73(10.6,-8.75) 74(10.6,-8.25) 75(10.6,-7.75) 76(10.6,-7.25) 77(10.6,-6.75) 78(10.6,-6.25) 79(10.6,-5.75) 80(10.6,-5.25) 81(10.6,-4.75) 82(10.6,-4.25) 83(10.6,-3.75) 84(10.6,-3.25) 85(10.6,-2.75) 86(10.6,-2.25) 87(10.6,-1.75) 88(10.6,-1.25) 89(10.6,-0.75) 90(10.6,-0.25) 91(10.6,0.25) 92(10.6,0.75) 93(10.6,1.25) 94(10.6,1.75) 95(10.6,2.25) 96(10.6,2.75) 97(10.6,3.25) 98(10.6,3.75) 99(10.6,4.25) 100(10.6,4.75) 101(10.6,5.25) 102(10.6,5.75) 103(10.6,6.25) 104(10.6,6.75) 105(10.6,7.25) 106(10.6,7.75) 107(10.6,8.25) 108(10.6,8.75)
  oval 0.3x1.65 smd: 37(-8.75,-10.6) 38(-8.25,-10.6) 39(-7.75,-10.6) 40(-7.25,-10.6) 41(-6.75,-10.6) 42(-6.25,-10.6) 43(-5.75,-10.6) 44(-5.25,-10.6) 45(-4.75,-10.6) 46(-4.25,-10.6) 47(-3.75,-10.6) 48(-3.25,-10.6) 49(-2.75,-10.6) 50(-2.25,-10.6) 51(-1.75,-10.6) 52(-1.25,-10.6) 53(-0.75,-10.6) 54(-0.25,-10.6) 55(0.25,-10.6) 56(0.75,-10.6) 57(1.25,-10.6) 58(1.75,-10.6) 59(2.25,-10.6) 60(2.75,-10.6) 61(3.25,-10.6) 62(3.75,-10.6) 63(4.25,-10.6) 64(4.75,-10.6) 65(5.25,-10.6) 66(5.75,-10.6) 67(6.25,-10.6) 68(6.75,-10.6) 69(7.25,-10.6) 70(7.75,-10.6) 71(8.25,-10.6) 72(8.75,-10.6) 109(8.75,10.6) 110(8.25,10.6) 111(7.75,10.6) 112(7.25,10.6) 113(6.75,10.6) 114(6.25,10.6) 115(5.75,10.6) 116(5.25,10.6) 117(4.75,10.6) 118(4.25,10.6) 119(3.75,10.6) 120(3.25,10.6) 121(2.75,10.6) 122(2.25,10.6) 123(1.75,10.6) 124(1.25,10.6) 125(0.75,10.6) 126(0.25,10.6) 127(-0.25,10.6) 128(-0.75,10.6) 129(-1.25,10.6) 130(-1.75,10.6) 131(-2.25,10.6) 132(-2.75,10.6) 133(-3.25,10.6) 134(-3.75,10.6) 135(-4.25,10.6) 136(-4.75,10.6) 137(-5.25,10.6) 138(-5.75,10.6) 139(-6.25,10.6) 140(-6.75,10.6) 141(-7.25,10.6) 142(-7.75,10.6) 143(-8.25,10.6) 144(-8.75,10.6)
  silkscreen extent -10.72,-9.38 9.38,9.57, body extent -10,-10 10,10, height 1.6
MS5611 [mm]
  rect 1.1x0.6 smd: 1(0,0) 2(0,-1.25) 3(0,-2.5) 4(0,-3.75) 5(2.2,-3.75) 6(2.2,-2.5) 7(2.2,-1.25) 8(2.2,0)
  silkscreen extent -1.25,-3.75 3.25,0.25
QFN16 [mm]
  rect 0.45x0.3 smd: 1(0,0) 2(0,-0.5) 3(0,-1) 4(0,-1.5) 9(2.55,-1.5) 10(2.55,-1) 11(2.55,-0.5) 12(2.55,0)
  rect 0.3x0.45 smd: 5(0.525,-2.025) 6(1.025,-2.025) 7(1.525,-2.025) 8(2.025,-2.025) 13(2.025,0.525) 14(1.525,0.525) 15(1.025,0.525) 16(0.525,0.525)
  silkscreen extent 0.76,-1.27 1.79,-0.23
QFN24 [mm]
  rect 0.8x0.35 smd: 1(-0.1,0) 2(-0.1,-0.5) 3(-0.1,-1) 4(-0.1,-1.5) 5(-0.1,-2) 6(-0.1,-2.5) 13(3.9,-2.5) 14(3.9,-2) 15(3.9,-1.5) 16(3.9,-1) 17(3.9,-0.5) 18(3.9,0)
  rect 0.35x0.8 smd: 7(0.65,-3.25) 8(1.15,-3.25) 9(1.65,-3.25) 10(2.15,-3.25) 11(2.65,-3.25) 12(3.15,-3.25) 19(3.15,0.75) 20(2.65,0.75) 21(2.15,0.75) 22(1.65,0.75) 23(1.15,0.75) 24(0.65,0.75)
  silkscreen extent 0.94,-2.21 2.86,-0.28
QFN-28 [mm] "Quad Flat No Lead, Plastic; 16 Terminals; Body 4 x 4 mm; Pitch 0.65 mm"
  rect 0.7x0.29 smd: 1(0,3) 2(0,2.5) 3(0,2) 4(0,1.5) 5(0,1) 6(0,0.5) 7(0,0) 15(4.5,0) 16(4.5,0.5) 17(4.5,1) 18(4.5,1.5) 19(4.5,2) 20(4.5,2.5) 21(4.5,3)
  rect 0.29x0.7 smd: 8(0.75,-0.75) 9(1.25,-0.75) 10(1.75,-0.75) 11(2.25,-0.75) 12(2.75,-0.75) 13(3.25,-0.75) 14(3.75,-0.75) 22(3.75,3.75) 23(3.25,3.75) 24(2.75,3.75) 25(2.25,3.75) 26(1.75,3.75) 27(1.25,3.75) 28(0.75,3.75)
  rect 0.45x0.45 smd: ""(0.15,3.6)
  rect 3x3 smd: ""(2.25,1.5)
  silkscreen extent -1.25,-1 4.8,4
SL508_2C [mm] "Weidmuller SL 5.08/02/90B"
  rect 2x2 hole 1.3: 1(-2.54,0)
  round 2 hole 1.3: 2(2.54,0)
  silkscreen extent -5.08,-2.1 5.08,9.9
SMA [mm] "DO-214-AC/SMA; 2 C-Bend Leads; Body 5 x 2.7 mm, inc. leads (LxW)"
  rect 2.4x1.8 smd: 1(-2.05,0) 2(2.05,0)
  silkscreen extent -3.65,-1.3 3.95,1.3
SOD-523 [mm]
  rect 0.6x0.7 smd: 1(-0.71,0) 2(0.71,0)
  silkscreen extent -1.66,-1 1.66,1
SOT223 [mm] "SOT223, 4-Leads, Body 6.7x7.3mm (max), Pitch 2.30mm, IPC High Density"
  rect 2.1x0.9 smd: 1(-2.85,2.3) 2(-2.85,0) 3(-2.85,-2.3)
  rect 2.1x3.3 smd: 4(2.85,0)
  silkscreen extent -2.97,-3.35 1.4,3.43
SOT23501 [mil]
  rect 49x22 smd: 1(0,0) 2(0,-37.5) 3(0,-75) 4(97,-75) 5(97,0)
  silkscreen extent 15,-95 80,20
TO263 [mm]
  rect 2.16x1.07 smd: 1(0,-3.4) 2(0,-1.7) 3(0,0) 4(0,1.7) 5(0,3.4)
  Top Layer region: -12.26,-4.164 -7.18,-4.164 -7.18,4.166 -12.26,4.166
  Top Layer region: -14.17,-5.401 -12.26,-5.401 -12.26,5.4 -14.17,5.4
  silkscreen extent -14.17,-5.4 2.5,5.4
TSSOP14 [mm] "Shrink Small Outline, TSSOP; 14 Leads; Body Width 4.4 mm; Pitch 0.65 mm"
  rect 0.3x1.65 smd: 1(-1.95,-2.775) 2(-1.3,-2.775) 3(-0.65,-2.775) 4(0,-2.775) 5(0.65,-2.775) 6(1.3,-2.775) 7(1.95,-2.775) 8(1.95,2.775) 9(1.3,2.775) 10(0.65,2.775) 11(0,2.775) 12(-0.65,2.775) 13(-1.3,2.775) 14(-1.95,2.775)
  silkscreen extent -2.77,-2.9 2.55,1.55
USB/UX60-MB-5ST [mm] "Connector; MINI USB, Type B, SM; 5 Position"
  rect 0.5x2 smd paste-0.2: 1(-1.6,0) 2(-0.8,0) 3(0,0) 4(0.8,0) 5(1.6,0)
  rect 2.5x2.2 smd paste-0.2: 6(-4.2,-0.25) 7(-4.2,-5.55) 8(4.2,-5.55) 9(4.2,-0.25)
  silkscreen extent -3.9,-8.7 3.9,0.8
XT8_2-SMD [mm] "Quartz 5.00mm x 3.20mm SMD"
  rect 1.9x2.4 smd: 1(-2.05,0) 2(2.05,0)
  silkscreen extent -2.6,-1.7 2.6,1.7
XT-5 [mm] "Quartz 17X 8x3.8mm"
  rect 1.3x1.9 smd: 1(-2.75,-1.6) 2(2.75,-1.6) 3(2.75,1.6) 4(-2.75,1.6)
  silkscreen extent -4,-1.9 4,1.9

## Part data
C1 C5 C9 C10 C13 C14 C15 C18 C19 C20 C29 C30 C31 C34 C36 C38 C47 C48 C49 C50 C51 C52 C53 C54 C55 C56 C58: library part CAPA, "CAP CER 0.1UF 25V 10% X7R 0805"
C2 C3 C4 C6 C7 C8 C11 C12 C16 C17 C27 C32: library part CAPA, "CAP CER 1UF 25V 10% X7R 0805"
C21 C22 C57: library part CAPA, "CAP CER 10UF 16V 20% X6S 0805"
C23 C24: library part "Cap Semi", "CAP CER 1UF 25V 10% X7R 0805"
C25: library part GRM216R71H103KA01D, "CAP CER 10nF 50V 10% X7R 0805"
C26: library part CAPA_EL, "CAP TANT 220UF 4V 20% 1411"
C28: library part CAPA_EL, "CAP TANT 22UF 25V 10% 2413"
C33: library part CAPA, "CAP CER 10nF 50V 10% X7R 0805"
C35: library part CAPA, "CAP CER 2.2nF 50V"
C37 C39 C41 C43 C45 C59: library part CAP, "CAP CER 0.1UF 25V 10% X7R 0805"
C40 C44: library part CAPA_T, "CAP TANT 4.7uF 10V 10% 1206"
C42 C46: library part CAP, "CAP CER 0.22uF 50V X7R 10% 0805"
C60 C61: library part "Cap Semi", "CAP CER 18PF 50V 5% NP0 0603"
D1: "TVS AVAL DIODE ARRAY 4CH, 5.5V"
D2 D3 D4 D5 D6 D7 D8 D9 D10: library part APT2012CGCK, "LED 2X1.2MM 570NM GN WTR CLR SMD"
D11 D13 D14 D15 D16 D17 D18 D19 D20 D21: library part Zener, "TVS DIODE 3.3VWM 8VC SOD523"
FB1: library part "Ferrite Bead", "EMI Filter Beads, Chips & Arrays 0805 330 OHM"
J2 J6 J8 J11 J24 J25 J26 J47: "CONN HEADER 2.54mm 2"
J3 J9: "CONN HEADER 2.54mm 4"
J5: library part USB_MINI_AB_RECEPTACLE, "CONN RECEPT MINI B USB2.0"
J13 J14 J16 J17 J19 J20 J27 J28 J29 J30 J31 J32 J33 J34 J35 J36 J37 J38 J39 J40 J41 J42 J43 J44 J45 J46: "CONN HEADER 2.54mm 3"
J21: library part CON8_SDCARD_SW, "CON 8 SD CARD PUSH SMT 1.1MM SP 75H AU"
J22: library part CON10A, "CONN HEADER 10POS DUAL .05\" SMD"
J23: library part 282857-2, "TERM BLOCK HDR 2POS R/A 5.08MM"
L1: library part SDR1307-820KL, "SDR1307-820KL"
MAG1 MAG2: "IC COMPASS 3 AXIS 16-LCC"
MPU1: "GYRO/ACCELEROMETER 6AXIS 24QFN"
R1 R3 R4 R5 R37: library part RES, "RES 1.69K OHM 1% 1/8W 0805"
R2 R11 R12 R13 R14 R21 R22 R23 R24 R58 R59 R60 R61 R62 R63 R64: library part RES, "RES 4.7K 0805"
R6 R7 R8 R15 R16 R17 R18 R25: library part RES, "RES 220R 0805"
R9 R10 R19 R20 R26 R27 R65: library part RES, "RES 15K 0805"
R28 R30 R31 R66: library part RES, "RES 10K 0805"
R29 R32: library part RES, "RES 2.2k 0805"
R33: library part RES, "RES 4.7K 1% 0603"
R34: library part RES, "RES 2K 1% 0805"
R35 R36: library part RES, "RES 1k 0805"
R38 R39 R40 R41 R42 R43 R44 R45: library part RES, "RES 330R 0805"
R67: library part RES, "RES 1M 0603"
SW1 SW2: library part "SW DIP-4", "SWITCH DIP TOP SLIDE 4POS SMD"
SW3: "SWITCH LT 6MM 260GF 5MM HEIGHT"
T1 T2 T3 T4: "TRANS NPN DARL 30V 1.2A SOT23"
U1: "Single-Chip USB to UART Bridge"
U2: "Low Dropout (LDO) Regulators ANA 800mA LDO"
U3: library part NCV1117ST50T3G, "IC REG LDO 3.3V 0.8A SOT223"
U4: "IC REG BUCK ADJ 3A TO263-5"
U5 U6 U7: "IC BUFF/DVR NON-INVERT 14TSSOP"
Y1: library part Crystal_32, "CRYSTAL 32.768 KHZ 12.5PF SMD"
Y2: library part XTAL, "CRYSTAL 8MHZ 18PF SMD"

## Via types
v1: diameter 0.6, hole 0.25, Top Layer to Bottom Layer, 475 vias
v2: diameter 6, hole 3, Top Layer to Bottom Layer, 4 vias
v3: diameter 1.2, hole 0.9, Top Layer to Bottom Layer, 2 vias

## Nets (pads, with @x,y where several pads share a name; then routed paths per layer and width w, separated by ;. In a path a pad name is that pad's centre, name@x,y a point inside that pad or via, vN(x,y) a via of type N, cw(c..) or ccw(c..) an arc to the next point about the centre after c; other vN are vias at no path point)
3V3: C3.1 C6.1 C15.2 C25.1 C26.1 C27.1 C32.1 C36.1 C37.2 C39.1 C41.1 C43.1 C45.1 C47.1 C48.2 C49.2 C50.2 C51.2 C52.2 C53.2 C54.2 C55.2 C56.2 EM1.1 J1.1 J3.1 J4.1 J7.1 J9.1 J10.1 J12.1 J15.1 J18.1 J21.P4 J22.1 J24.1 L1.2 MAG1.2 MAG1.4 MAG1.6 MAG1.13 MAG2.2 MAG2.4 MAG2.6 MAG2.13 MPU1.13 MSC1.1 R28.1 R29.2 R30.1 R31.1 R32.2 R37.2 R58.2 R59.2 R60.2 R61.2 R62.2 R63.2 R64.2 SW1.1 SW1.2 SW1.3 SW1.4 SW2.1 SW2.2 SW2.3 SW2.4 uC1.5 uC1.16 uC1.42 uC1.43 uC1.56 uC1.70 uC1.94 uC1.108 uC1.122 uC1.135 | length 142.7
  Top Layer w0.2: J21.P4@6.55,57.625 8.1,57.625 8.3,57.825 8.3,58.5 8.6,58.8 C15.2@9.784,58.8 9.784,57.516 9.9,57.4 v1(10.3,57.4) ; R28.1@10.824,56.3 11.8,56.3 11.9,56.4 v1(11.9,57) ; v1(13.455,9.845) SW1.1@13.455,11.1 SW2.1@13.455,22.72 SW2.2@13.455,25.26 SW2.3@13.455,27.8 SW2.4@13.455,30.34 ; MSC1.1@15,34.45 16.75,34.45 16.984,34.684 C37.2@19,34.684 v1(19,33.5) ; R59.2@21.465,35.319 21.5,35.354 v1(21.5,36.1) ; R58.2@23.565,35.319 23.6,35.354 v1(23.6,36.2) ; EM1.1@25.105,29.217 27.217,29.217 27.573,29.573 C32.1@29.565,29.573 ; R64.2@32,19.238 v1(32.834,19.238) ; MPU1.13@35.75,23.25 35.775,23.275 38.8,23.275 C36.1@38.8,23.4 39,23.2 v1(39,22) ; v1(35.8,62.6) C48.2@36.784,62.6 ; C48.2@37,62.816 37,63.4 37.2,63.6 38.8,63.6 39.45,62.95 uC1.5@41.1,62.95 ; v1(37.832,56.316) C49.2@37.832,57.4 C49.2@37.882,57.45 ; C49.2@37.832,57.45 uC1.16@41.1,57.45 ; v1(38.666,17.738) R60.2@39.5,17.738 ; R61.2@41,17.738 v1(41.834,17.738) ; v1(42.716,18.016) C43.1@44,18.016 ; v1(42.8,40.9) 43.216,41.316 C47.1@44.2,41.316 44.2,42.25 45.45,43.5 uC1.42@45.45,45.6 ; MAG2.13@43.475,22.025 43.475,24.491 43.5,24.516 v1(43.5,25.6) ; MAG2.2@44.5,20 44.5,18.516 C43.1@44,18.016 ; MAG2.4@45.5,20 45.5,18.2 ; uC1.43@45.95,45.6 45.95,42.801 46.7,42.051 C50.2@46.7,41.316 v1(46,40.616) ; MAG2.6@46.025,21.025 46.675,21.025 46.8,20.9 46.8,18.1 46.716,18.016 45.684,18.016 45.5,18.2 ; uC1.135@47.45,66.8 47.45,69.6 48,70.15 C56.2@48,70.984 v1(49.484,70.984) ; uC1.56@52.5,45.55 52.5,43.516 52.7,43.316 53.484,43.316 53.8,43 C51.2@53.8,42.216 v1(54.684,42.216) ; v1(52.6,71) C55.2@52.6,70.384 52.6,68.7 52.9,68.4 53.5,68.4 53.95,67.95 uC1.122@53.95,66.8 ; v1(54.033,18.016) C39.1@55.222,18.016 ; MAG1.13@54.697,21.975 54.697,24.459 C41.1@54.738,24.5 v1(54.738,25.638) ; MAG1.2@55.722,19.95 55.722,19.222 55.222,18.722 C39.1@55.222,18.016 ; MAG1.4@56.722,19.95 56.722,18.222 56.516,18.016 C39.1@55.222,18.016 ; MAG1.6@57.247,20.975 v1(57.899,20.975) ; R62.2@58,75.262 v1(58,76.1) ; uC1.70@59.45,45.6 59.45,44.05 60,43.5 60.8,43.5 60.9,43.4 C52.2@60.9,42.416 61.116,42.2 v1(62.1,42.2) ; R63.2@60,75.262 v1(60,76.1) ; uC1.94@62.3,57.95 62.35,57.9 63.866,57.9 64.55,57.216 C53.2@65.7,57.216 66.984,57.216 67.5,56.7 v1(67.5,56.5) ; uC1.108@62.3,64.95 64.284,64.95 C54.2@64.684,65.35 65,65.666 v1(65,66.55) ; v1(65.6,20.1) R32.2@66.338,20.1 ; v1(65.7,25) 66.238,25 R30.1@66.338,25.1 ; R31.1@66.338,22.1 v1(66.338,22.934) ; R29.2@66.338,26.6 v1(66.338,27.434) ; v1(75,20.3) 75,21.5 J22.1@75.1,21.6 ; v1(86.111,19.268) C6.1@87.3,19.268 90.728,19.268 J9.1@90.76,19.3 ; v1(86.311,66.984) C3.1@87.5,66.984 87.516,67 J3.1@90.92,67 ; C43.1@44,18.016 45.316,18.016 45.5,18.2
  other v1: 41,82.5 42.5,82.5 44,82.5 45.5,82.5 41,84 42.5,84 44,84 45.5,84 41,85.5 42.5,85.5 41,87 42.5,87 41,88.5 42.5,88.5 41,90 42.5,90 41,91.5 42.5,91.5 41,93 42.5,93 41,94.5 42.5,94.5 41,96 42.5,96 41,97.5 42.5,97.5 41,99 42.5,99
3V3_A: C9.1 C10.1 C13.1 C14.1 C18.1 C19.1 C20.1 C22.2 FB1.2 J13.1 J14.1 J16.1 J17.1 J19.1 J20.1 U3.2 U3.4 | length 24.7
  Top Layer w0.2: v1(33.7,51.1) 34.484,51.1 FB1.2@34.984,51.6 ; C9.1@56,89.516 56,91.96 J13.1@57,92.96 ; C10.1@60,89.516 60,91.96 J14.1@61,92.96 ; C13.1@64,89.516 64,91.96 J16.1@65,92.96 ; C14.1@68,89.532 68,91.96 J17.1@69,92.96 ; C18.1@72,89.516 72,92.032 J19.1@72.968,93 ; C19.1@76,89.516 76,91.96 J20.1@77,92.96
  other v1: 6,65.5 7.5,65.5 7,66.5 8.5,66.5 7,68 8.5,68 7,69.5 8.5,69.5 5.5,71 7,71 8.5,71 5.5,72.5
5V: C21.2 C29.1 C30.1 C31.1 J25.1 J39.2 J40.2 J41.2 J42.2 J43.2 J44.2 J45.2 J46.2 U2.2 U2.4 U3.3 U5.14 U6.14 U7.14 | length 13.7
  Top Layer w0.2: C29.1@78,61 C29.1@78.468,61 ; C29.1@78.284,60.816 C29.1@78.468,61 ; v1(78.5,47.9) 78.5,48.984 C30.1@78.516,49 80.8,49 81.05,48.75 U6.14@81.05,47.775 ; v1(78.5,60) C29.1@78.5,61 ; v1(78.716,36.784) C31.1@78.716,35.5 81.1,35.5 81.25,35.35 U7.14@81.25,34.275 ; C29.1@79,61 80.95,61 81.15,60.8 ; C29.1@78.468,61 C29.1@78.5,61 ; C29.1@78.468,61 78.484,61.016 C29.1@78.5,61
  other v1: 2,74 2,75 2,76 2,77 2,78 2,79 2,80 3.5,80 5,80 5,81.5
CP2102_VDD: C1.1 C2.1 R2.2 U1.6 | length 11.2
  Top Layer w0.2: C1.1@12.5,43.316 C2.1@15,43.316 17.9,43.316 18.254,42.962 R2.2@19.1,42.962 20.146,42.962 20.5,43.316 22.284,43.316 22.5,43.1 U1.6@22.5,42.25
GND: C1.2 C2.2 C3.2 C4.2 C5.1 C6.2 C7.2 C8.2 C9.2 C10.2 C11.2 C12.2 C13.2 C14.2 C15.1 C16.2 C17.2 C18.2 C19.2 C20.2 C21.1 C22.1 C23.2 C24.2 C26.2 C27.2 C28.2 C29.2 C30.2 C31.2 C32.2 C33.2 C34.2 C35.2 C36.2 C37.1 C38.2 C39.2 C40.2 C41.2 C43.2 C44.2 C45.2 C47.2 C48.1 C49.1 C50.1 C51.1 C52.1 C53.1 C54.1 C55.1 C56.1 C57.1 C58.2 C59.2 C60.1 C61.1 D1.2 D2.C D3.C D4.C D5.C D6.C D7.C D8.C D9.C D11.1 D12.2 D13.1 D14.1 D15.1 D16.1 D17.1 D18.1 D19.1 D20.1 D21.1 EM1.5 EM1.6 J1.4 J3.4 J4.4 J5.5 J5.6 J5.7 J5.8 J5.9 J7.6 J9.4 J10.6 J12.6 J13.3 J14.3 J15.6 J16.3 J17.3 J18.10 J19.3 J20.3 J21.P6 J21.S1 J21.S2 J21.S3 J21.S4 J22.3 J22.5 J23.2 J24.2 J25.2 J26.2 J27.3 J28.3 J29.3 J30.3 J31.3 J32.3 J33.3 J34.3 J35.3 J36.3 J37.3 J38.3 J39.3 J40.3 J41.3 J42.3 J43.3 J44.3 J45.3 J46.3 J47.2 MAG1.9 MAG1.11 MAG2.9 MAG2.11 MPU1.1 MPU1.11 MPU1.18 MSC1.2 MSC1.3 MSC1.4 MSC1.5 R11.1 R12.1 R13.1 R14.1 R21.1 R22.1 R23.1 R24.1 R34.1 R35.2 R36.1 R66.1 SW3.B T1.2 T2.2 T3.2 T4.2 U1.3 U2.1 U3.1 U4.3 U4.5 U5.1 U5.4 U5.7 U5.10 U5.13 U6.1 U6.4 U6.7 U6.10 U6.13 U7.1 U7.4 U7.7 U7.10 U7.13 uC1.6 uC1.17 uC1.18 uC1.23 uC1.24 uC1.25 uC1.26 uC1.27 uC1.28 uC1.29 uC1.30 uC1.33 uC1.34 uC1.44 uC1.57 uC1.71 uC1.93 uC1.107 uC1.121 uC1.134 | length 179
  Top Layer w0.2: J21.S3@0.5,51.5 v1(1.524,51.5) ; R14.1@1.438,11.1 R13.1@1.438,13.6 R12.1@1.438,16.1 R11.1@1.438,18.6 v1(1.438,19.762) ; R24.1@1.438,22.8 R23.1@1.438,25.3 R22.1@1.438,27.8 R21.1@1.438,30.3 v1(1.438,31.438) ; v1(3,38.323) J5.8@3,40 ; v1(3,46.723) J5.7@3,48.4 ; v1(3.926,51.5) J21.S4@4.95,51.5 ; v1(5.615,55.075) J21.P6@6.55,55.075 ; v1(8.3,38.3) J5.9@8.3,40 ; J5.6@8.3,48.4 v1(8.3,50.077) ; J5.5@8.55,42.6 v1(10.1,42.6) ; v1(10.311,50.516) C4.2@11.5,50.516 ; v1(11.5,38.2) MSC1.5@12.8,38.2 ; C15.1@11.816,58.8 11.916,58.7 12.316,59.1 v1(12.7,59.1) ; C1.2@12.5,41.284 v1(13.689,41.284) ; v1(13.311,50.516) C5.1@14.5,50.516 ; MSC1.2@15,35.7 15.755,35.7 v1(16.6,35.7) ; MSC1.3@15,36.95 15.05,36.9 15.15,37 v1(16.6,37) ; MSC1.4@15,38.2 v1(16.5,38.2) ; C2.2@15,41.284 v1(16.189,41.284) ; v1(16.548,45.648) D1.2@17.836,45.648 ; C37.1@19,36.716 v1(19,37.683) ; v1(19.223,9.79) D20.1@20,9.79 ; v1(23.223,9.79) D19.1@24,9.79 ; U1.3@24,42.25 24,43.3 v1(24.2,43.5) ; v1(26.2,83.7) U4.3@26.2,85.5 ; v1(27.223,9.79) D18.1@28,9.79 ; v1(27.423,81) D12.2@29.05,81 ; v1(28.811,18.484) C33.2@30,18.484 ; v1(29.565,26.335) C32.2@29.565,27.541 ; v1(30.65,25.75) MPU1.1@31.75,25.75 ; v1(31.223,9.79) D17.1@32,9.79 ; v1(33.9,49.2) 34.884,49.2 C57.1@34.984,49.1 C58.2@34.984,46.5 ; v1(34.368,41.668) C59.2@35.4,41.668 ; MPU1.11@34.5,22.5 v1(34.5,23.327) ; v1(34.8,57.4) C49.1@35.8,57.4 ; v1(35.223,9.79) D13.1@36,9.79 ; MPU1.18@35.75,25.75 v1(36.577,25.75) ; v1(35.984,60.784) C48.1@37,60.784 ; v1(36,54.9) 36.338,54.9 R66.1@36.438,55 ; v1(36.516,27.711) C35.2@36.516,28.9 ; v1(36.616,18.911) C34.2@36.616,20.1 ; v1(38.686,62.6) 38.836,62.45 uC1.6@41.1,62.45 ; C36.2@38.8,25.432 38.901,25.533 v1(38.901,26.5) ; v1(39.223,9.79) D14.1@40,9.79 ; v1(39.6,54) 39.65,53.95 uC1.23@41.1,53.95 uC1.24@41.1,53.45 uC1.25@41.1,52.95 uC1.26@41.1,52.45 uC1.27@41.1,51.95 uC1.28@41.1,51.45 uC1.29@41.1,50.95 uC1.30@41.1,50.45 ; v1(39.65,56.45) uC1.18@41.1,56.45 uC1.17@41.1,56.95 ; uC1.34@41.1,48.45 uC1.33@41.1,48.95 42.45,48.95 v1(42.8,49.3) ; v1(41.484,23.311) C45.2@41.484,24.5 ; v1(42.516,15.984) C43.2@44,15.984 C43.2@43.816,15.8 ; v1(43.223,9.79) D15.1@44,9.79 ; C47.2@44.2,39.284 44.3,39.184 v1(44.3,38.2) ; MAG2.11@44.5,22.55 v1(44.5,21.898) 45.255,21.898 45.5,22.143 MAG2.9@45.5,22.55 ; v1(46.1,38.2) 46.6,38.2 46.7,38.3 C50.1@46.7,39.284 ; uC1.44@46.45,45.6 v1(46.45,47.05) ; v1(47.223,9.79) D16.1@48,9.79 ; v1(47.4,65.2) 47.95,65.75 uC1.134@47.95,66.8 ; C56.1@48,73.016 v1(49.484,73.016) ; v1(48.1,25) C44.2@49.151,25 ; v1(49.3,1.1) D9.C@49.3,2.025 ; v1(51.5,72.5) 52.516,72.5 C55.1@52.6,72.416 ; v1(52.68,47.244) 52.95,46.974 uC1.57@52.95,45.6 ; C41.2@52.706,24.5 52.706,26.106 53,26.4 v1(54.1,26.4) ; v1(53.3,1.1) D7.C@53.3,2.025 ; C51.1@53.8,40.184 v1(54.684,40.184) ; v1(53.9,15.8) 55.038,15.8 C39.2@55.222,15.984 ; v1(54.3,68.5) 54.45,68.35 uC1.121@54.45,66.8 ; v1(55.3,1.1) D6.C@55.3,2.025 ; MAG1.11@55.722,22.5 v1(55.722,21.848) 56.548,21.848 56.722,22.022 MAG1.9@56.722,22.5 ; C7.2@56,85.016 v1(56,86.5) C9.2@56,87.484 ; v1(57.8,1.1) D5.C@57.8,2.025 ; v1(59.8,1.1) D4.C@59.8,2.025 ; uC1.71@59.95,45.6 v1(59.95,46.95) ; C8.2@60,85.016 v1(60,86.5) C10.2@60,87.484 ; v1(60.373,23.557) C40.2@60.373,25 ; v1(60.75,64.45) uC1.107@62.3,64.45 ; C52.1@60.9,40.384 v1(61.816,40.384) ; v1(61.8,1.1) D3.C@61.8,2.025 ; uC1.93@62.3,57.45 63.75,57.45 64.2,57 64.2,55.6 64.616,55.184 C53.1@65.7,55.184 ; v1(63.8,1) D2.C@63.8,2.025 ; C11.2@64,85.016 v1(64,86.5) C13.2@64,87.484 ; v1(65.362,39.538) C61.1@65.362,40.3 ; C53.1@65.784,55.1 66.6,55.1 67.6,55.1 v1(67.7,55) ; C54.1@66.8,65.434 66.866,65.5 v1(67.3,65.5) ; v1(66.838,39.538) C60.1@66.838,40.3 ; C12.2@68,85.016 v1(68,86.5) C14.2@68,87.5 ; C16.2@72,85.016 v1(72,86.5) C18.2@72,87.484 ; J22.3@75.1,22.87 75.27,22.7 75.37,22.8 v1(77,22.8) ; J22.5@75.1,24.14 75.14,24.1 v1(77,24.1) ; C17.2@76,85.016 v1(76,86.5) C19.2@76,87.484 ; v1(76.484,47.811) C30.2@76.484,49 ; v1(76.684,34.311) C31.2@76.684,35.5 ; C29.2@78.5,63.032 v1(78.5,64) ; v1(79.7,85.1) 79.7,85.684 C38.2@80,85.984 ; v1(81,43.7) 81,42.275 U6.1@81.05,42.225 ; U5.1@81.15,54.425 v1(81.15,55.677) ; U7.1@81.25,28.725 v1(81.25,30.15) ; v1(81.7,46.2) U6.13@81.7,47.775 ; v1(81.8,32.6) 81.9,32.7 U7.13@81.9,34.275 ; U5.13@81.8,59.975 v1(81.8,61.6) ; v1(82.5,86.1) D21.1@82.5,86.79 ; U6.4@83,42.225 v1(83,43.7) ; v1(83.1,53.173) U5.4@83.1,54.425 ; U7.4@83.2,28.725 v1(83.2,30.1) ; v1(83.6,46.3) 83.65,46.35 U6.10@83.65,47.775 ; U5.10@83.75,59.975 v1(83.75,61.227) ; v1(83.8,32.6) 83.85,32.65 U7.10@83.85,34.275 ; U6.7@84.95,42.225 85,42.275 v1(85,43.7) ; U5.7@85.05,54.425 v1(85.05,55.677) ; v1(85.1,30.3) 85.15,30.25 U7.7@85.15,28.725 ; v1(86,20.9) 86.9,20.9 C6.2@87.3,21.3 ; v1(86.1,68.8) 87.084,68.8 87.4,69.116 C3.2@87.5,69.016 ; v1(51.3,1.1) D8.C@51.3,2.025 v1(51.3,1.1)
  other v1: 26,59.5 27,59.5 28,59.5 29,59.5 1.5,62 2.5,62 3.5,62 7,62 31.5,62.5 7,63 31.5,63.5 7,64 31.5,64.5 31.5,65.5 21.9,68.3 23.1,68.9 26.8,69.5 28.5,69.5 21.9,70 23.9,70 26.8,70.5 28.5,70.5 8,72.5 9,72.5 10,72.5 11,72.5 12,72.5 13,72.5 18.5,77 19.5,77 20.5,77 21.5,77 8.5,78 10.5,78 12.5,78 20.5,78.5 8.5,79 10.5,79 12.5,79 8.5,80 10.5,80 12.5,80 8.5,81 10.5,81 12.5,81 31,84.8 31,86.1 1,87.5 16.5,88 19,88 21,88 23,88 1,89 21,89 23,89 3,89.5 4.5,89.5 21,90 23,90 1.5,91 3,91 4.5,91 21,91 23,91 16.5,92 19,92 16.5,93.5 19,93.5 52.5,93.5 54,93.5 52.5,94.5 54,94.5 16.5,95 19,95 52.5,95.5 54,95.5 16.5,96.5 19,96.5 16.5,98 19,98
  other v2: 5,5 95,6 5,95 95,95.5
GPIO0: J18.2 uC1.144 | length 17.1
  Top Layer w0.2: J18.2@34.3,76.5 34.3,74.4 34.9,73.8 41.366,73.8 42.95,72.216 uC1.144@42.95,66.8
GPIO1: J18.3 uC1.143 | length 14.9
  Top Layer w0.2: J18.3@36.84,76.5 36.84,74.66 37.3,74.2 41.531,74.2 43.45,72.281 uC1.143@43.45,66.8
GPIO2: J18.4 uC1.142 | length 12.8
  Top Layer w0.2: J18.4@39.38,76.5 39.38,74.92 39.7,74.6 41.697,74.6 43.95,72.347 uC1.142@43.95,66.8
GPIO3: J18.5 uC1.141 | length 10.7
  Top Layer w0.2: J18.5@41.92,76.5 41.92,74.943 44.4,72.463 uC1.141@44.4,66.85
GPIO4: J18.6 uC1.140 | length 9.9
  Top Layer w0.2: J18.6@44.46,76.5 44.46,73.04 44.95,72.55 uC1.140@44.95,66.8
GPIO5: J18.7 uC1.139 | length 10.9
  Top Layer w0.2: uC1.139@45.45,66.8 45.45,74.95 45.8,75.3 46.7,75.3 47,75.6 J18.7@47,76.5
GPIO6: J18.8 uC1.138 | length 12.8
  Top Layer w0.2: uC1.138@45.95,66.8 45.95,74.566 46.284,74.9 49.1,74.9 49.54,75.34 J18.8@49.54,76.5
GPIO7: J18.9 uC1.137 | length 15
  Top Layer w0.2: uC1.137@46.45,66.8 46.45,74.2 46.75,74.5 51.8,74.5 52.08,74.78 J18.9@52.08,76.5
I2C0_AUX_CL: MAG2.1 MPU1.7 R61.1 | length 17.3
  Top Layer w0.2: v1(31.3,22.1) 31.7,22.5 MPU1.7@32.5,22.5 ; R61.1@41,19.262 R61.1@41.038,19.3 ; v1(41.1,19.9) 41.1,19.362 R61.1@41.038,19.3 ; MAG2.1@44,20 44,19.4 43.9,19.3 R61.1@41.038,19.3
  Signal Layer 2 (HOR) w0.2: v1(31.3,22.1) 31.3,21.5 31.7,21.1 36.149,21.1 36.249,21.2 40.6,21.2 41.1,20.7 v1(41.1,19.9)
I2C0_AUX_DA: MAG2.16 MPU1.6 R60.1 | length 18.9
  Top Layer w0.2: v1(30.1,23.2) 30.15,23.25 MPU1.6@31.75,23.25 ; R60.1@39.5,19.262 39.4,19.362 v1(39.4,20.5) 39.425,20.525 MAG2.16@43.475,20.525
  Signal Layer 2 (HOR) w0.2: v1(30.1,23.2) 30.1,20.8 30.4,20.5 v1(39.4,20.5)
I2C0_SCL: EM1.3 J1.3 MAG1.1 MPU1.23 MSC1.8 R59.1 uC1.45 | length 104.2
  Top Layer w0.2: J1.3@4,35.5 4,33.9 4.2,33.7 12.6,33.7 12.8,33.9 MSC1.8@12.8,34.45 ; v1(20.025,31.875) 21.275,31.875 21.465,32.065 R59.1@21.465,33.795 R59.1@21.425,33.755 ; MPU1.23@33,26.5 v1(33,27.282) ; v1(46.7,42.9) 46.7,44.1 46.95,44.35 uC1.45@46.95,45.6 ; v1(54.1,19.4) 54.9,19.4 55.2,19.7 55.222,19.7 MAG1.1@55.222,19.95
  Signal Layer (VERT) w0.2: EM1.3@20.025,29.217 v1(20.025,31.875) ; v1(33,27.282) v1(33,31.9) ; v1(46.7,31.9) 46.7,32.849 46.7,37.951 46.7,38.449 ; 46.7,38.449 v1(46.7,42.9) ; v1(53.5,31.9) 53.3,31.9 52.9,31.5 52.9,21.4 53.225,21.075 53.674,21.075 54.1,20.649 v1(54.1,19.4)
  Signal Layer 2 (HOR) w0.2: J1.3@4,35.5 4,32.5 4.6,31.9 v1(33,31.9) v1(53.5,31.9)
I2C0_SDA: EM1.2 J1.2 MAG1.16 MPU1.24 MSC1.7 R58.1 uC1.46 | length 96.2
  Top Layer w0.2: J1.2@6.54,35.5 6.54,36.64 6.9,37 10.5,37 10.9,36.6 10.9,36 11.2,35.7 MSC1.7@12.8,35.7 ; v1@23.565,32.6 R58.1@23.565,33.795 ; v1(32.1,27.9) 32.1,27.3 32.5,26.9 MPU1.24@32.5,26.5 ; v1(47.3,43.7) 47.3,44.1 47.45,44.25 uC1.46@47.45,45.6 ; v1(53,20.4) 54.622,20.4 MAG1.16@54.697,20.475
  Signal Layer (VERT) w0.2: EM1.2@22.565,29.217 22.565,29.565 23.6,30.6 v1(23.6,32.6) v1@23.565,32.565 ; v1(32.1,27.9) v1(32.1,32.5) ; v1(47.3,32.5) 47.4,32.5 47.3,32.6 v1(47.3,43.7) ; v1(52.8,32.5) 52.5,32.2 52.5,21 53.025,20.475 53,20.45 v1(53,20.4)
  Signal Layer 2 (HOR) w0.2: J1.2@6.54,35.5 6.54,32.96 7,32.5 v1@47.4,32.5 ; v1(47.3,32.5) v1@47.4,32.5 ; v1(52.8,32.5) v1@47.4,32.5
I2C1_SCL: J4.3 R63.1 uC1.64 | length 69.3
  Top Layer w0.2: v1(56.1,47.4) 56.45,47.05 uC1.64@56.45,45.6 ; v1(60,73) R63.1@60,73.738
  Signal Layer (VERT) w0.2: v1(56.1,47.4) 56.1,48.4 56.8,49.1 v1(56.8,73)
  Signal Layer 2 (HOR) w0.2: v1@56.6,73 56.7,72.9 v1(56.8,73) ; v1@56.7,73 v1(60,73) 95.5,73 95.96,72.54 J4.3@95.96,71.5
I2C1_SDA: J4.2 R62.1 uC1.65 | length 66.5
  Top Layer w0.2: uC1.65@56.95,45.6 56.95,47.25 57,47.3 v1(57,47.4) ; v1(57.5,72) 58,72.5 R62.1@58,73.738
  Signal Layer (VERT) w0.2: v1(57,47.4) 57,48.2 57.5,48.7 v1(57.5,72)
  Signal Layer 2 (HOR) w0.2: v1@57.4,72 77.166,72 78.954,70.212 93.212,70.212 93.46,70.46 J4.2@93.46,71.5
JTAG_TCLK: J22.4 R31.2 uC1.50 | length 43.4
  Top Layer w0.2: uC1.50@49.45,45.6 49.45,35.219 51.269,33.4 59.034,33.4 59.5,32.934 59.5,27.834 60.234,27.1 61.6,27.1 61.9,26.8 61.9,23.9 62.2,23.6 67.6,23.6 67.862,23.338 R31.2@67.862,22.1 68.7,22.1 68.9,22.3 68.9,22.7 69.07,22.87 J22.4@71.036,22.87
JTAG_TDI: J22.8 R30.2 uC1.51 | length 41.8
  Top Layer w0.2: uC1.51@49.95,45.6 49.95,35.284 51.434,33.8 59.2,33.8 59.9,33.1 59.9,28 60.4,27.5 61.766,27.5 62.3,26.966 62.3,24.2 62.5,24 67.6,24 67.862,24.262 R30.2@67.862,25.1 68.9,25.1 69.21,25.41 J22.8@71.036,25.41
JTAG_TDO: J22.6 uC1.52 | length 41.4
  Top Layer w0.2: uC1.52@50.45,45.6 50.45,35.35 51.2,34.6 68.4,34.6 69,34 v1(69.4,34) ; v1@69.34,24.14 J22.6@71.036,24.14
  Bottom Layer w0.2: v1(69.3,24.1) 69.4,24.2 v1(69.4,34)
JTAG_TMS: J22.2 R32.1 uC1.53 | length 49.6
  Top Layer w0.2: uC1.53@50.95,45.6 50.95,35.45 51.4,35 v1(69.4,35) ; R32.1@67.862,20.1 70.9,20.1 v1(71,20.2) 71.036,20.236 J22.2@71.036,21.6
  Bottom Layer w0.2: v1(69.4,35) 70.7,35 71,34.7 v1(71,20.2)
LED0: D2.A R6.2 | length 1.6
  Top Layer w0.2: D2.A@63.8,3.775 R6.2@63.8,5.338
LED0_UC: R6.1 uC1.102 | length 84.3
  Top Layer w0.2: uC1.102@62.3,61.95 62.35,61.9 71.06,61.9 75.2,57.76 75.2,31.16 75.56,30.8 78.289,30.8 80.8,28.289 80.8,18.14 78.66,16 65.36,16 63.8,14.44 R6.1@63.8,6.862
LED1: D3.A R7.2 | length 1.6
  Top Layer w0.2: D3.A@61.8,3.775 R7.2@61.8,5.338
LED1_UC: R7.1 uC1.101 | length 84.2
  Top Layer w0.2: R7.1@61.8,6.862 61.8,9.1 63.4,10.7 63.4,14.606 65.194,16.4 78.494,16.4 80.4,18.306 80.4,28.123 78.123,30.4 75.394,30.4 74.8,30.994 74.8,57.594 70.994,61.4 62.35,61.4 uC1.101@62.3,61.45
LED2: D4.A R8.2 | length 1.6
  Top Layer w0.2: D4.A@59.8,3.775 R8.2@59.8,5.338
LED2_UC: R8.1 uC1.100 | length 84.2
  Top Layer w0.2: R8.1@59.8,6.862 59.8,7.7 63,10.9 63,14.772 65.028,16.8 78.328,16.8 80,18.472 80,27.958 77.958,30 75.228,30 74.4,30.828 74.4,57.428 70.878,60.95 uC1.100@62.3,60.95
LED3: D5.A R15.2 | length 1.6
  Top Layer w0.2: D5.A@57.8,3.775 R15.2@57.8,5.338
LED3_UC: R15.1 uC1.99 | length 85
  Top Layer w0.2: R15.1@57.8,6.862 57.8,7.765 58.135,8.1 59.634,8.1 62.6,11.066 62.6,14.937 64.863,17.2 78.163,17.2 79.6,18.637 79.6,27.792 77.792,29.6 75.063,29.6 74,30.663 74,57.263 70.863,60.4 62.35,60.4 uC1.99@62.3,60.45
LED4: D6.A R16.2 | length 1.6
  Top Layer w0.2: D6.A@55.3,3.775 R16.2@55.3,5.4
LED4_UC: R16.1 uC1.98 | length 86.5
  Top Layer w0.2: R16.1@55.3,6.924 55.3,8.1 55.7,8.5 59.469,8.5 62.2,11.231 62.2,15.103 64.697,17.6 77.997,17.6 79.2,18.803 79.2,27.626 77.626,29.2 74.897,29.2 73.6,30.497 73.6,57.097 70.797,59.9 62.35,59.9 uC1.98@62.3,59.95
LED5: D7.A R17.2 | length 1.6
  Top Layer w0.2: D7.A@53.3,3.775 R17.2@53.3,5.4
LED5_UC: R17.1 uC1.97 | length 87.5
  Top Layer w0.2: R17.1@53.3,6.924 53.3,8.5 53.7,8.9 59.303,8.9 61.8,11.397 61.8,15.269 64.531,18 77.831,18 78.8,18.969 78.8,27.461 77.461,28.8 74.731,28.8 73.2,30.331 73.2,56.931 70.731,59.4 62.35,59.4 uC1.97@62.3,59.45
LED6: D8.A R18.2 | length 1.6
  Top Layer w0.2: D8.A@51.3,3.775 R18.2@51.3,5.4